# Altium PCB BatteryIot -V2.PcbDoc (part 1 of 2)
Units mm, origin at the board's own origin, x right, y up, seen from the top; angles counter-clockwise.
Board outline 114 x 84 mm, 2 copper layers (Top Layer, Bottom Layer); 153 components, 93 nets, 528 pads, 132 vias.
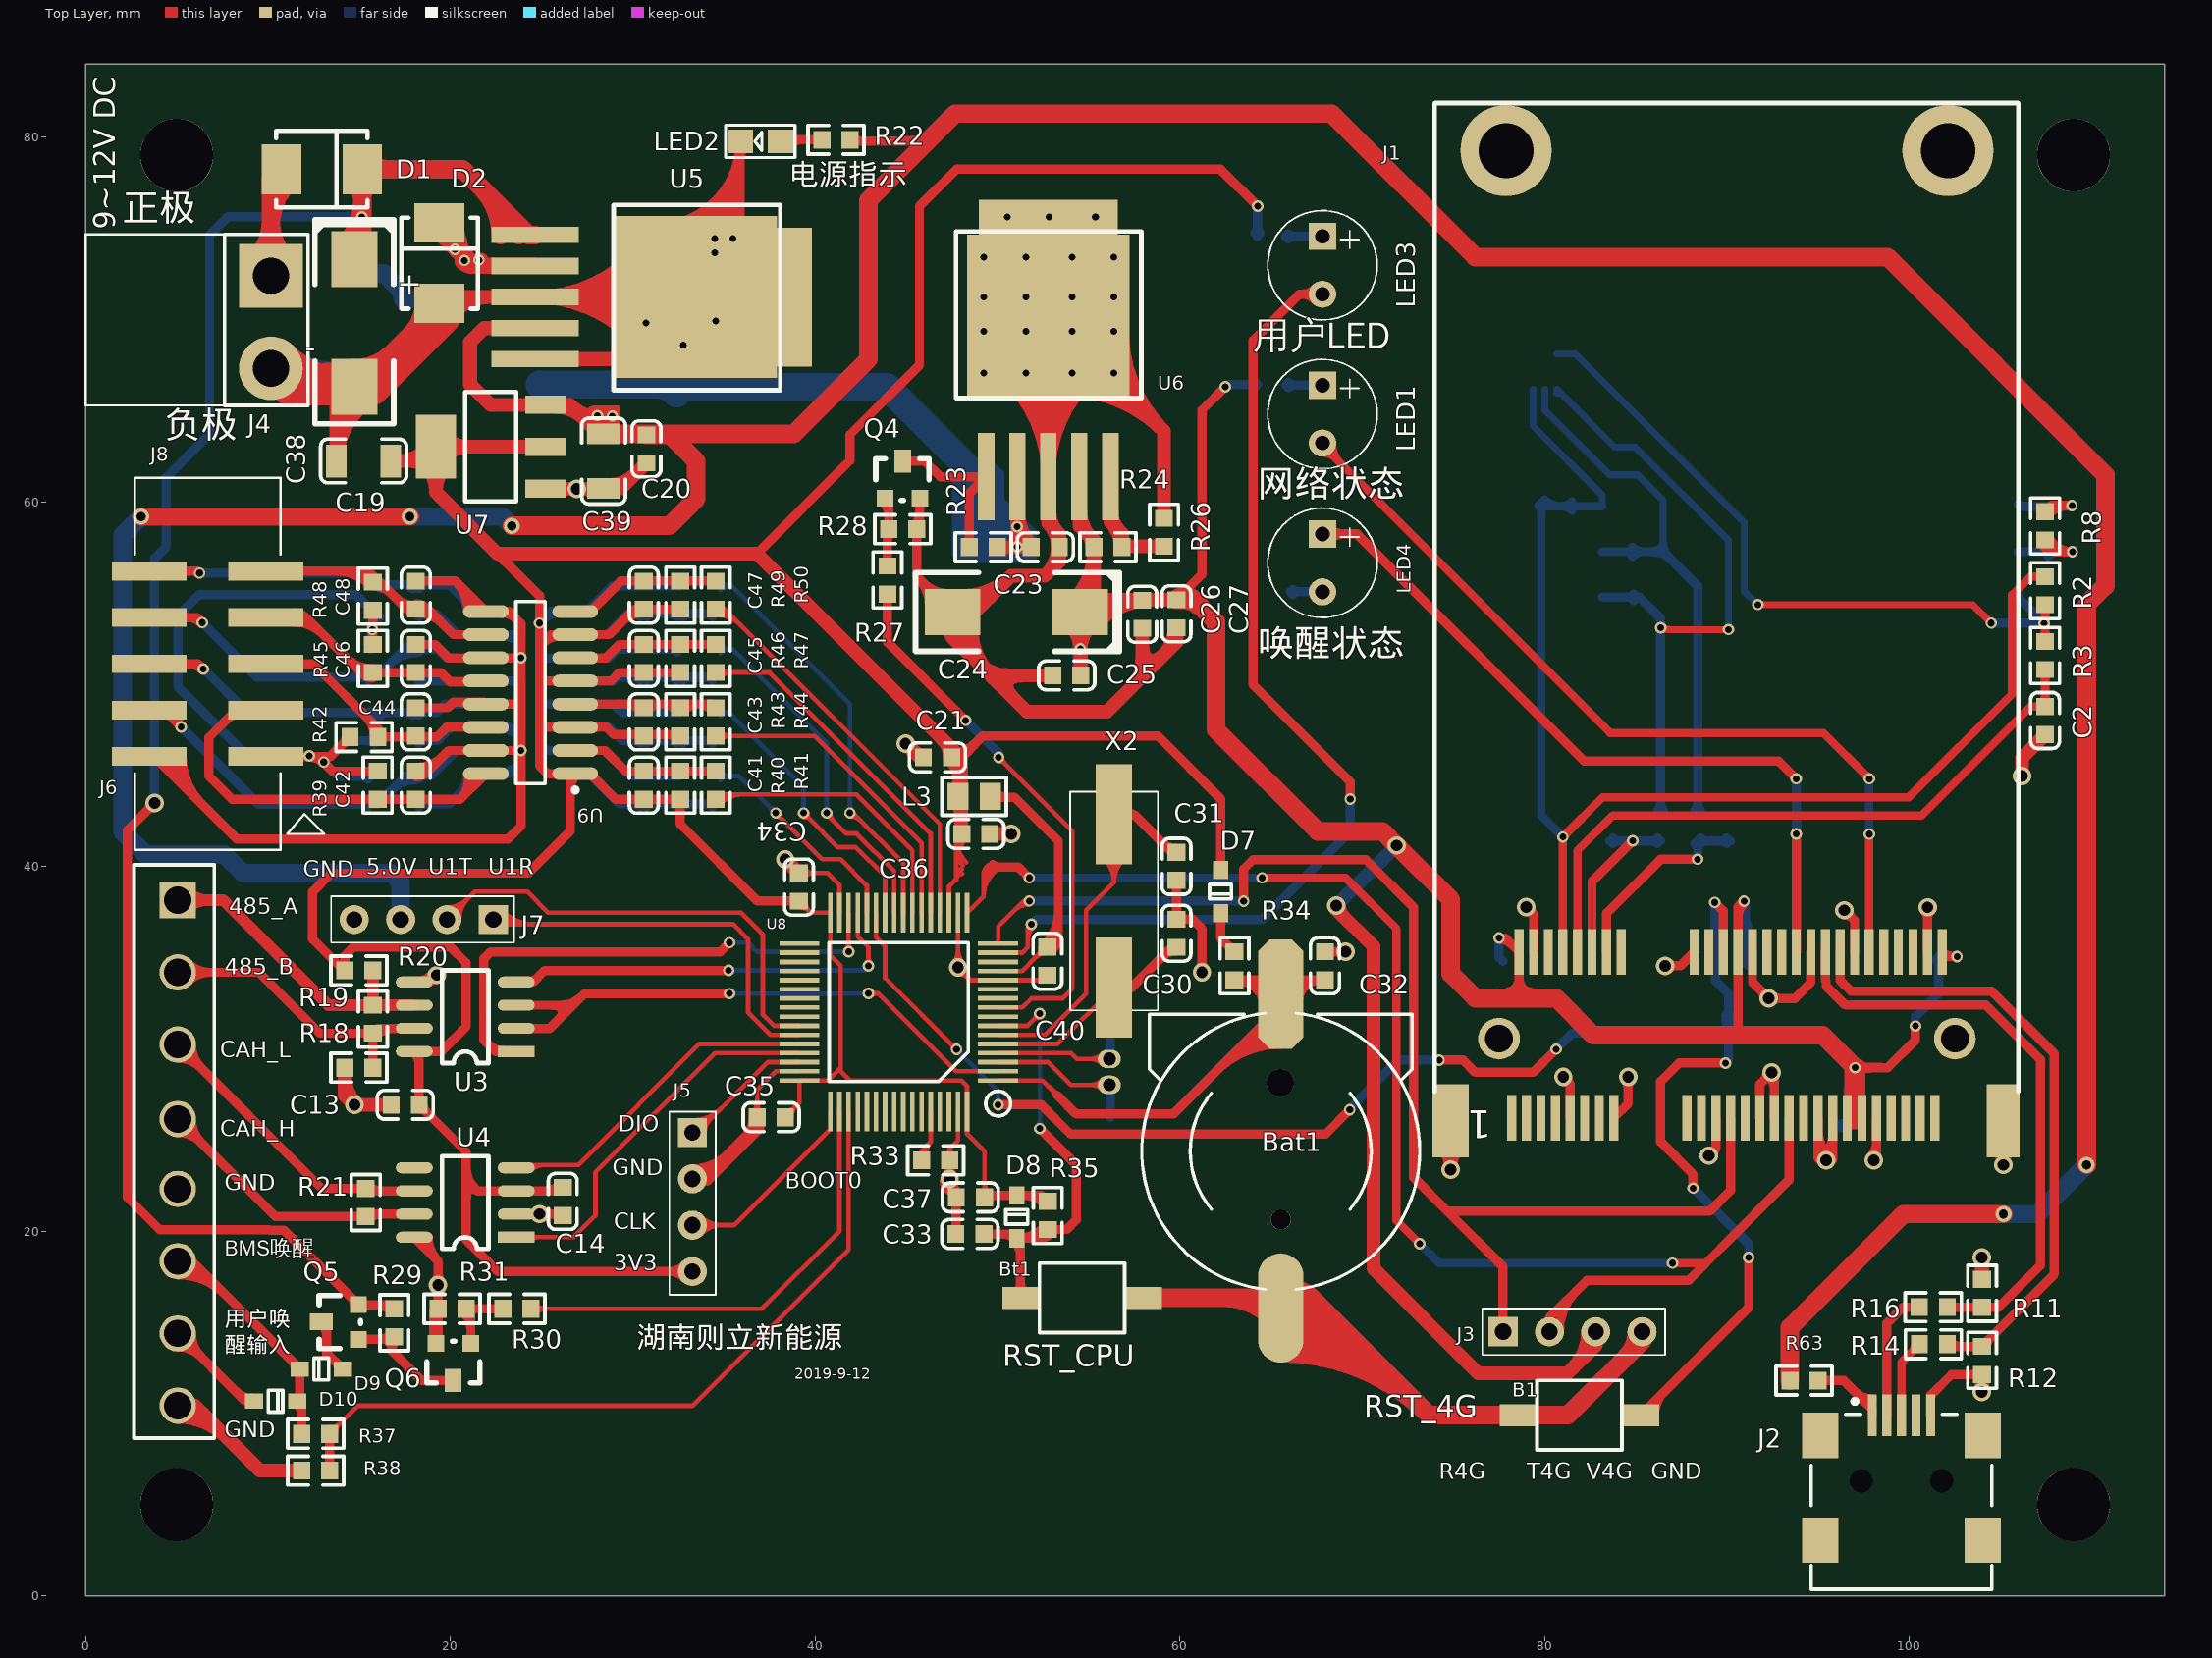
[diagram p0: Top Layer view]
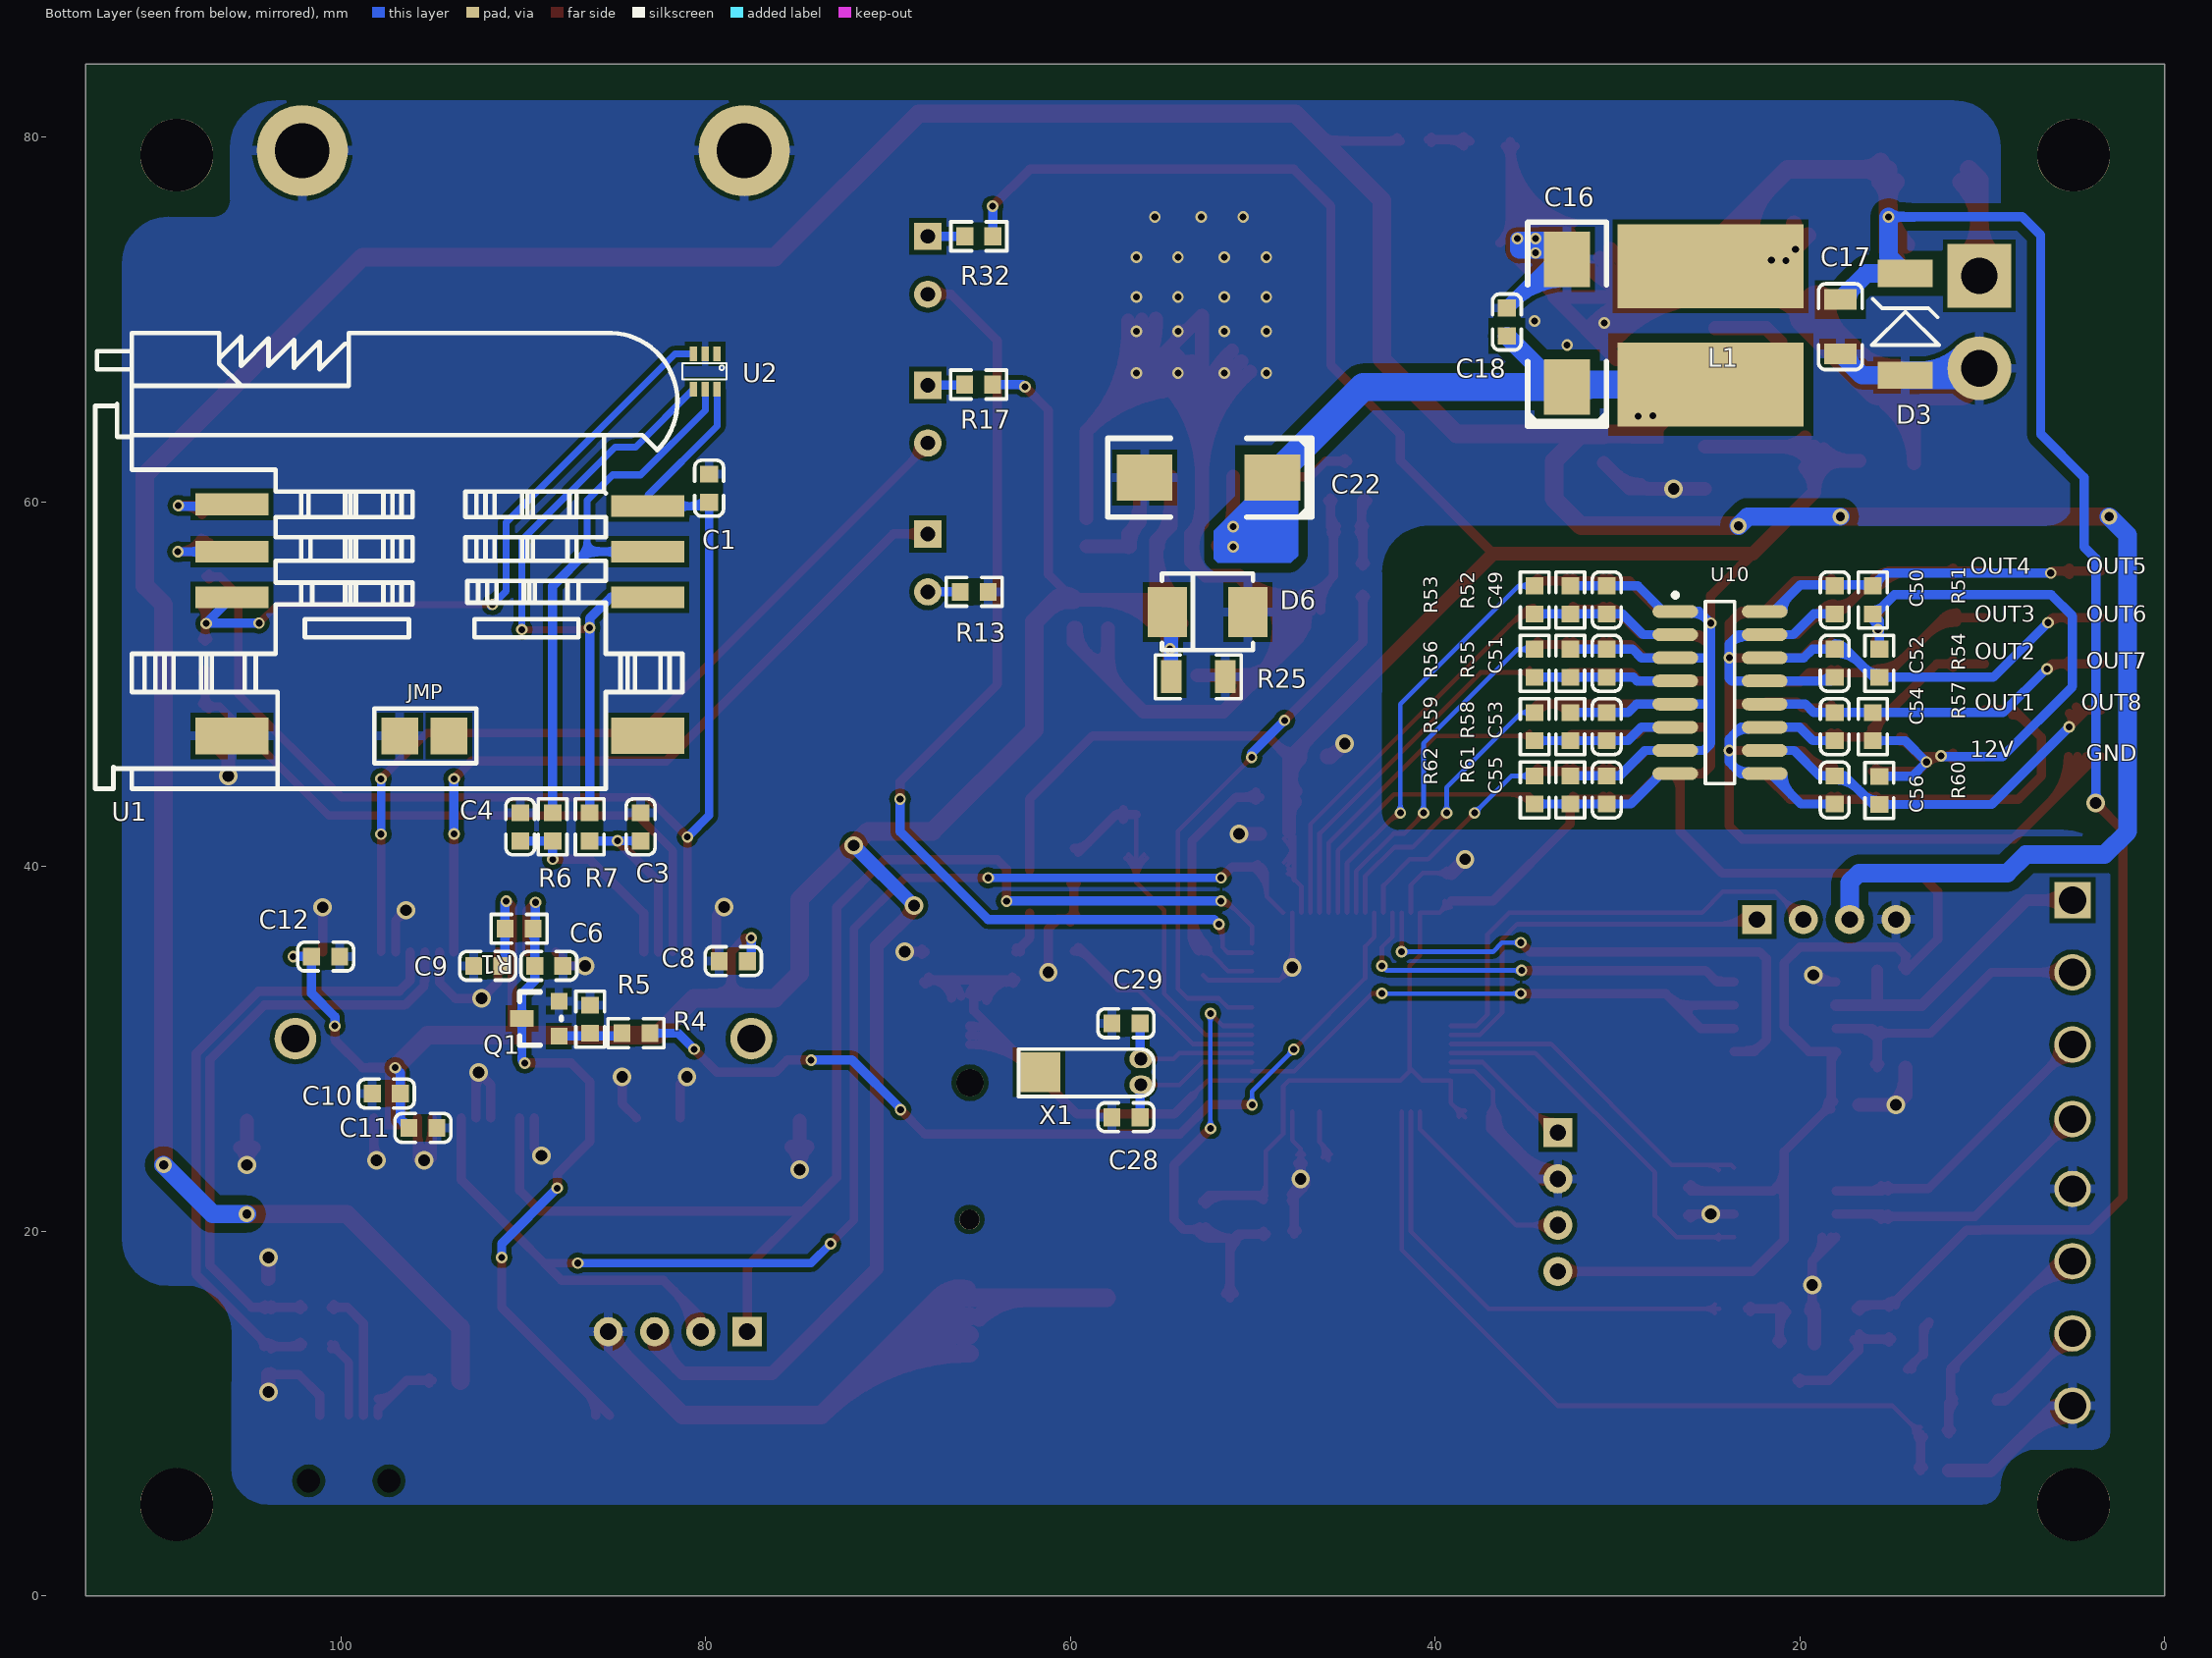
[diagram p1: Bottom Layer view, seen from below]
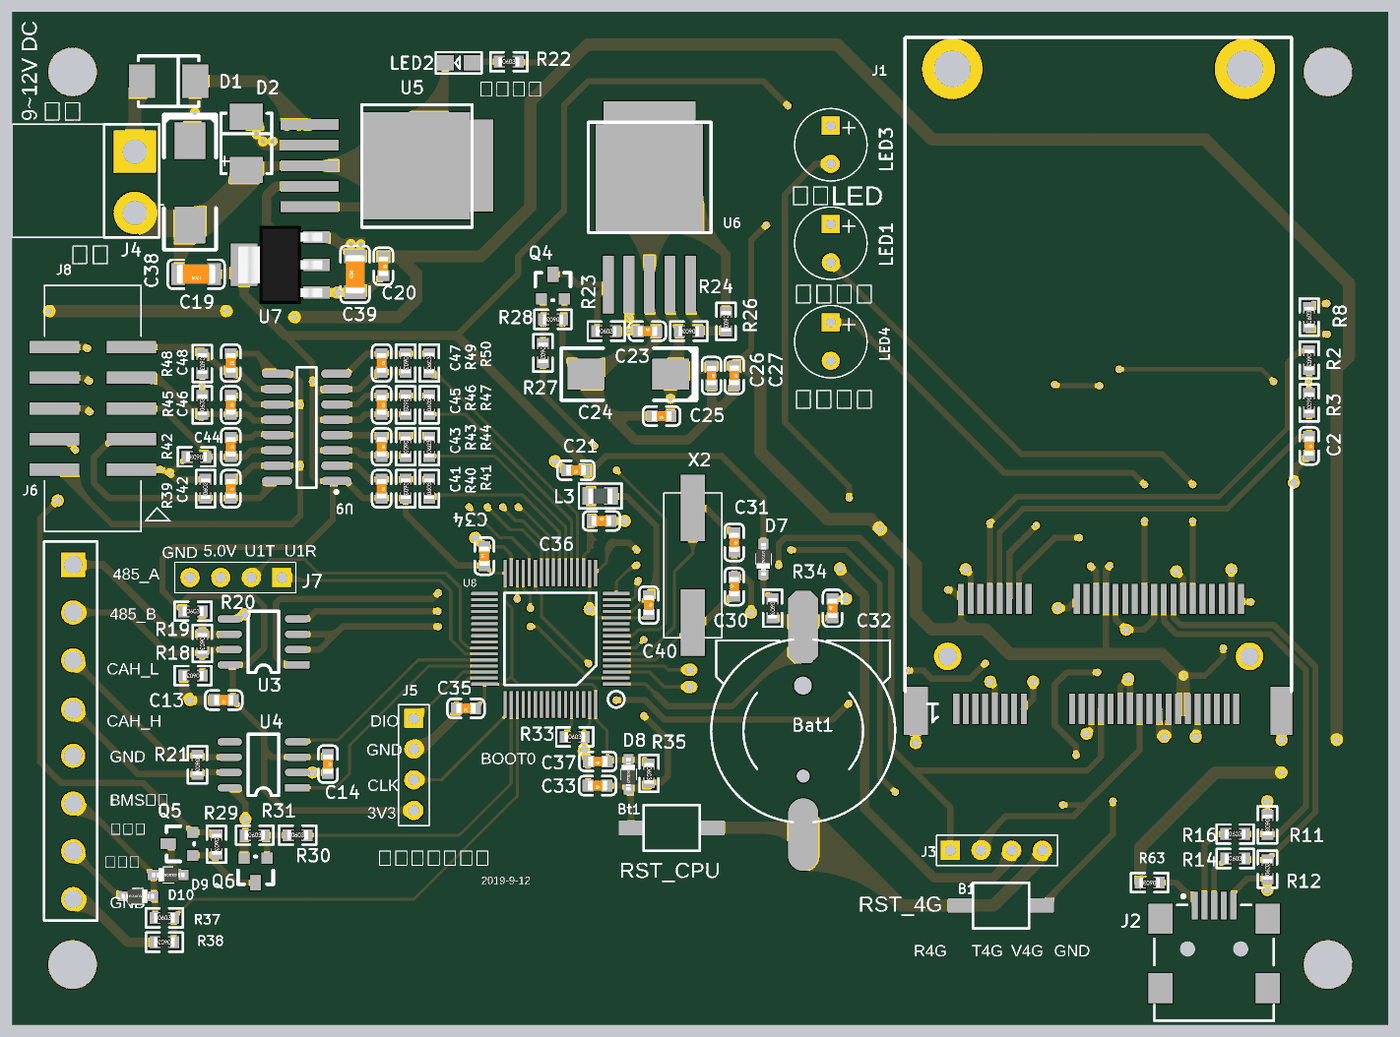
[diagram p3: 3D render of the assembled board from above, using the file's embedded part models]
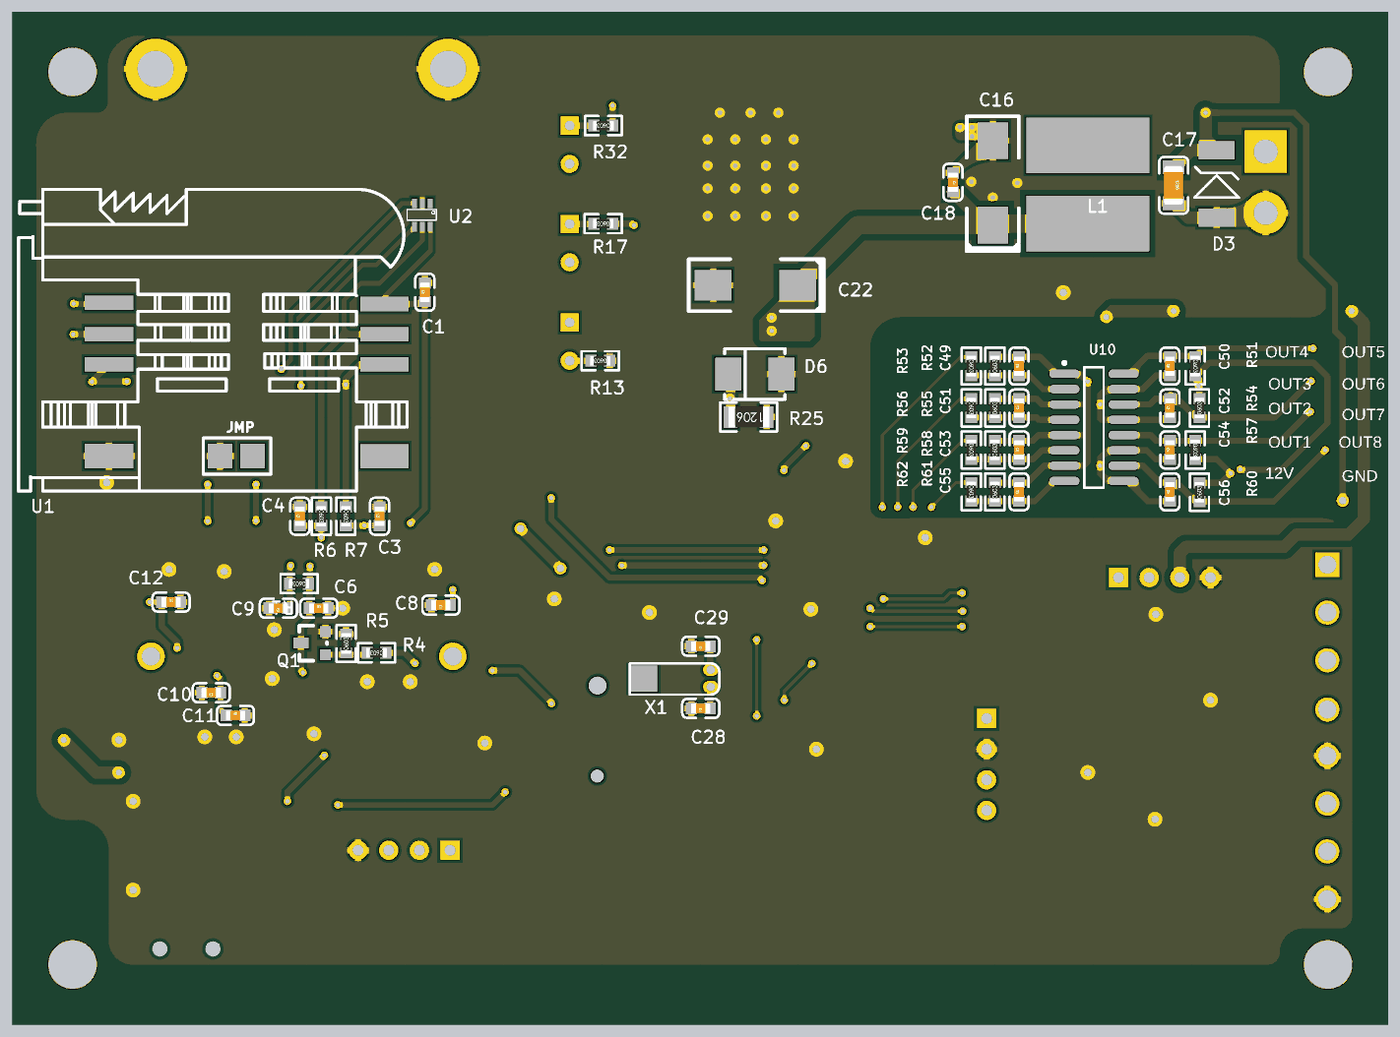
[diagram p4: 3D render of the assembled board from below, using the file's embedded part models]

## Layer stack, top to bottom
Top Solder: solder mask 0.0102, Solder Resist, Dk 3.5
Top Layer: signal copper 0.0356
Dielectric 1: dielectric 0.32, FR-4, Dk 4.8
Bottom Layer: signal copper 0.0356
Bottom Solder: solder mask 0.0102, Solder Resist, Dk 3.5

## Board outline
0,0 0,84 114,84 114,0

## Design rules (kind name [scope] priority, off if disabled: settings)
Clearance Clearance_2 [InNamedPolygon('GND') vs InNetClass('PW_IN')] p1: gap=0.508
Clearance Clearance_1 [InNet('12V') or InNet('5.0V') vs InPoly] p2: gap=0.508
Clearance [All] p3: gap=0.254
DiffPairsRouting [All] p1: maxlimit=0.254 minlimit=0.254 mostfreqgap=0.254 toplayer_minwidth=0.381 toplayer_maxwidth=0.635 toplayer_prefwidth=0.508 bottomlayer_minwidth=0.381 bottomlayer_maxwidth=0.635 bottomlayer_prefwidth=0.508 maxuncoupledlength=12.7
HoleSize [All] p1: absolutevalues=TRUE maxlimit=25.4 minlimit=0.025 maxpercent=80.000 minpercent=20.000
PolygonConnect PolygonConnect_1 [IsVia vs IsPolygon] p1: connectstyle=Direct reliefconductorwidth=0.254 reliefentries=4 polygonreliefangle="90 Angle" airgapwidth=0.254
PolygonConnect [All] p2: connectstyle=Relief reliefconductorwidth=0.508 reliefentries=4 polygonreliefangle="90 Angle" airgapwidth=0.254
RoomDefinition TopLevelMCU [InComponentClass('TopLevelMCU')] p1: confinementstyle=ConfineIn formatcopy=TRUE lockcomponents=FALSE outline -25.411,-46 25.389,-46 25.389,-20.6 -25.411,-20.6
RoomDefinition PWR [InComponentClass('PWR')] p2: confinementstyle=ConfineIn formatcopy=TRUE lockcomponents=FALSE outline -25.411,-46 25.389,-46 25.389,-20.6 -25.411,-20.6
RoomDefinition GPIO [InComponentClass('GPIO')] p3: confinementstyle=ConfineIn formatcopy=TRUE lockcomponents=FALSE outline -25.411,-46 25.389,-46 25.389,-20.6 -25.411,-20.6
RoomDefinition EC20 [InComponentClass('EC20')] p4: confinementstyle=ConfineIn formatcopy=TRUE lockcomponents=FALSE outline -25.411,-46 25.389,-46 25.389,-20.6 -25.411,-20.6
RoomDefinition COMM [InComponentClass('COMM')] p5: confinementstyle=ConfineIn formatcopy=TRUE lockcomponents=FALSE outline -25.411,-46 25.389,-46 25.389,-20.6 -25.411,-20.6
RoutingVias [All] p1: holewidth=0.711 width=1.27 viastyle="Through Hole" minholewidth=0.711 minwidth=1.27 maxholewidth=0.711 maxwidth=1.27
SolderMaskExpansion [All] p1: expansion=0.102
Width [All] p1: maxlimit=20.32 minlimit=0.254 preferedwidth=0.508
27 further rules are at their usual default settings.

## Classes and differential pairs
component class TopLevelMCU: Bat1 Bt1 C28 C29 C30 C31 C32 C33 C34 C35 C36 C37 D7 D8 J5 J6 J7 R33 R34 R35 U8 X1 X2
component class COMM: C13 C14 R18 R19 R20 R21 U3 U4
component class EC20: B1 C1 C2 C3 C4 C6 C8 C9 C10 C11 C12 J1 J2 J3 LED1 LED4 Q1 R1 R2 R3 R4 R5 R6 R7 R8 R11 R12 R13 R14 R16 R17 R63 U1 U2
component class GPIO: C41 C42 C43 C44 C45 C46 C47 C48 C49 C50 C51 C52 C53 C54 C55 C56 D9 D10 J8 LED3 Q5 Q6 R29 R30 R31 R32 R37 R38 R39 R40 R41 R42 R43 R44 R45 R46 R47 R48 R49 R50 R51 R52 R53 R54 R55 R56 R57 R58 R59 R60 R61 R62 U9 U10
component class PWR: C16 C17 C18 C19 C20 C21 C22 C23 C24 C25 C26 C27 C38 C39 C40 D1 D2 D3 D6 J4 L1 L3 LED2 Q4 R22 R23 R24 R25 R26 R27 R28 U5 U6 U7
differential pair USB: +USB_P -USB_N
differential pair CAN: +CAN_P -CAN_N
differential pair RS: +RS_P -RS_N

## Components (designator, comment, footprint, x,y, rotation, side; value= is the part's Value field where it differs from the comment)
B1 "Reset" "3*6*2.5贴片 微动开关" 81.908,9.899 r180 top
Bat1 "3v Battery" BATM 65.532,24.376 r180 top
Bt1 "Reset" "3*6*2.5贴片 微动开关" 54.635,16.332 r180 top
C1 "104" 0603_C 79.812,60.734 r90 bottom
C2 "33pF" 0603_C 107.442,47.998 r270 top
C3 "33pF" 0603_C 83.566,42.164 r90 bottom
C4 "33pF" 0603_C 90.17,42.164 r90 bottom
C6 "104" 0603_C 88.6,34.544 r180 bottom
C8 "104" 0603_C 78.486,34.798 r0 bottom
C9 "104" 0603_C 91.948,34.544 r0 bottom
C10 "104" 0603_C 97.513,27.536 r0 bottom
C11 "104" 0603_C 95.504,25.654 r180 bottom
C12 "104" 0603_C 100.838,35.052 r180 bottom
C13 "104" 0603_C 17.526,26.924 r180 top
C14 "104" 0603_C 26.162,21.623 r270 top
C16 "220uF/16V" SMD-CT-7343 32.766,66.294 r90 bottom
C17 "104" 1206_C 17.78,69.596 r270 bottom
C18 "104" 0603_C 36.068,69.85 r270 bottom
C19 "10uF" 1206_C 15.24,62.23 r180 top
C20 "104" 0603_C 30.748,62.893 r270 top
C21 "104" 0603_C 46.711,45.974 r180 top
C22 "470uF/10V" SMD-CT-7343 48.927,61.317 r0 bottom
C23 "104" 0603_C 52.621,57.506 r0 top
C24 "470uF/10V" SMD-CT-7343 54.54,53.951 r180 top
C25 "104" 0603_C 53.797,50.47 r180 top
C26 "33pF" 0603_C 57.937,53.823 r270 top
C27 "10pF" 0603_C 59.817,53.848 r270 top
C28 "22p" 0603_C 56.956,26.238 r0 bottom
C29 "22p" 0603_C 56.956,31.394 r0 bottom
C30 "22p" 0603_C 59.817,36.33 r90 top
C31 "22p" 0603_C 59.817,39.997 r270 top
C32 "104" 0603_C 67.957,34.544 r90 top
C33 "104" 0603_C 48.489,19.837 r180 top
C34 "104" 0603_C 39.116,38.862 r90 top
C35 "104" 0603_C 37.592,26.238 r180 top
C36 "104" 0603_C 48.819,41.781 r0 top
C37 "104" 0603_C 48.514,21.844 r180 top
C38 "470u/25V" SMD-CT-7343 14.732,73.301 r270 top
C39 "10uF" 1206_C 28.403,62.224 r90 top
C40 "104" 0603_C 52.738,34.798 r270 top
C41 "100nF 10% 50V" 0603_C 30.607,44.45 r270 top
C42 "100nF 10% 50V" 0603_C 18.108,44.45 r270 top
C43 "100nF 10% 50V" 0603_C 30.607,47.924 r270 top
C44 "100nF 10% 50V" 0603_C 18.108,47.924 r270 top
C45 "100nF 10% 50V" 0603_C 30.607,51.398 r270 top
C46 "100nF 10% 50V" 0603_C 18.108,51.398 r270 top
C47 "100nF 10% 50V" 0603_C 30.607,54.872 r270 top
C48 "100nF 10% 50V" 0603_C 18.108,54.872 r270 top
C49 "100nF 10% 50V" 0603_C 30.593,54.61 r90 bottom
C50 "100nF 10% 50V" 0603_C 18.094,54.61 r90 bottom
C51 "100nF 10% 50V" 0603_C 30.593,51.136 r90 bottom
C52 "100nF 10% 50V" 0603_C 18.094,51.136 r90 bottom
C53 "100nF 10% 50V" 0603_C 30.593,47.662 r90 bottom
C54 "100nF 10% 50V" 0603_C 18.094,47.662 r90 bottom
C55 "100nF 10% 50V" 0603_C 30.593,44.188 r90 bottom
C56 "100nF 10% 50V" 0603_C 18.094,44.188 r90 bottom
D1 "SS34" SMB(DO-214AA)_S1 12.954,78.232 r180 top
D2 "SS34" SMB(DO-214AA)_S1 19.406,73.076 r270 top
D3 "M7" SMBJ 14.224,69.596 r90 bottom
D6 "SMBJ5.0A" SMB(DO-214AA)_S1 52.483,53.951 r180 bottom
D7 "1N4148" SOD-323 62.23,38.608 r90 top
D8 "1N4148" SOD-323 51.054,20.777 r270 top
D9 "1N4148" SOD-323 12.925,12.432 r0 top
D10 "1N4148" SOD-323 10.414,10.668 r180 top
J1 "MINI-PCIE-CON" EC20_MINIPCI 90,52.652 r0 top locked
J2 "Debug 4G" USB_MINI_NEW 101.882,6.212 r0 top
J3 "CON4" CON4(2.54) 77.724,14.478 r90 top
J4 "CON2" CON5.08-2P 10.16,72.39 r0 top
J5 "CON4" CON4(2.54) 33.274,25.4 r0 top
J6 "CON8" CON8-3.96mm 5.055,24.286 r0 top
J7 "CON4" CON4(2.54) 22.352,37.084 r270 top
J8 "CON10" XH2.54-SMD-5*2P 6.687,51.105 r90 top locked
L1 "33uH" "CD105-33uH 2A" 24.892,72.898 r180 bottom
L3 "10nH" 0805_L 48.717,43.84 r0 top
LED1 "NET" LED 67.818,64.802 r270 top
LED2 "5VPWR" SMDLED 38.1,79.756 r180 top
LED3 "5VPWR" LED 67.818,72.962 r270 top
LED4 "WAKE" LED 67.818,56.642 r270 top
Q1 "S8050" SOT-23 88.872,31.611 r90 bottom
Q4 "2N5551" SOT-23 44.754,61.017 r0 top
Q5 "AO3401A P道沟 X13A15 SOT-23" SOT-23 14.133,14.972 r90 top
Q6 "2N5551" SOT-23 20.202,13.005 r180 top
R1 "1K" 0603_R 90.23,36.576 r0 bottom
R2 "10K" 0603_R 107.442,55.118 r270 top
R3 "22R" 0603_R 107.442,51.562 r270 top
R4 "4.7K" 0603_R 83.82,30.849 r0 bottom
R5 "47K" 0603_R 86.332,31.619 r90 bottom
R6 "22R" 0603_R 88.392,42.164 r270 bottom
R7 "22R" 0603_R 86.36,42.164 r270 bottom
R8 "0R" 0603_R 107.442,58.674 r90 top
R11 "15K" 0603_R 103.986,16.586 r270 top
R12 "15K" 0603_R 103.986,12.903 r90 top
R13 "1k" 0603_R 65.278,55.054 r0 bottom
R14 "22R" 0603_R 101.319,13.792 r0 top
R16 "22R" 0603_R 101.311,15.824 r0 top
R17 "1k" 0603_R 65.032,66.421 r0 bottom
R18 "360R" 0603_R 14.986,28.956 r180 top
R19 "120R" 0603_R 15.748,31.619 r270 top
R20 "360R" 0603_R 14.986,34.29 r0 top
R21 "120R" 0603_R 15.356,21.563 r270 top
R22 "4.7K" 0603_R 41.148,79.846 r0 top
R23 "51K" 0603_R 49.217,57.506 r0 top
R24 "82K" 0603_R 56.058,57.506 r180 top
R25 "470R" 1206_R 52.991,50.395 r0 bottom
R26 "47K" 0603_R 59.131,58.318 r270 top
R27 "4.7K" 0603_R 43.967,55.702 r270 top
R28 "47K" 0603_R 44.803,58.485 r180 top
R29 "5.1K" 0603_R 16.927,14.972 r270 top
R30 "4.7K" 0603_R 23.65,15.734 r0 top
R31 "47K" 0603_R 20.094,15.734 r0 top
R32 "1k" 0603_R 65.024,74.549 r0 bottom
R33 "10K" 0603_R 46.608,23.876 r0 top
R34 "1K" 0603_R 62.992,34.544 r270 top
R35 "10K" 0603_R 52.756,20.853 r270 top
R37 "8k" 0603_R 12.609,8.876 r0 top
R38 "3.3k" 0603_R 12.609,6.858 r180 top
R39 "3.3KΩ  ±5%" 0603_R 16.016,44.45 r90 top
R40 "2KΩ ±5%" 0603_R 32.604,44.45 r270 top
R41 "700Ω ±10%" 0603_R 34.558,44.45 r90 top
R42 "3.3KΩ  ±5%" 0603_R 15.265,47.092 r180 top
R43 "2KΩ ±5%" 0603_R 32.604,47.924 r270 top
R44 "700Ω ±10%" 0603_R 34.558,47.924 r90 top
R45 "3.3KΩ  ±5%" 0603_R 15.748,51.398 r90 top
R46 "2KΩ ±5%" 0603_R 32.604,51.398 r270 top
R47 "700Ω ±10%" 0603_R 34.558,51.398 r90 top
R48 "3.3KΩ  ±5%" 0603_R 15.748,54.813 r270 top
R49 "2KΩ ±5%" 0603_R 32.604,54.872 r270 top
R50 "700Ω ±10%" 0603_R 34.558,54.872 r90 top
R51 "3.3KΩ  ±5%" 0603_R 16.002,54.61 r270 bottom
R52 "2KΩ ±5%" 0603_R 32.59,54.61 r90 bottom
R53 "700Ω ±10%" 0603_R 34.544,54.61 r270 bottom
R54 "3.3KΩ  ±5%" 0603_R 15.646,51.136 r90 bottom
R55 "2KΩ ±5%" 0603_R 32.59,51.136 r90 bottom
R56 "700Ω ±10%" 0603_R 34.544,51.136 r270 bottom
R57 "3.3KΩ  ±5%" 0603_R 16.002,47.662 r270 bottom
R58 "2KΩ ±5%" 0603_R 32.59,47.662 r90 bottom
R59 "700Ω ±10%" 0603_R 34.544,47.662 r270 bottom
R60 "3.3KΩ  ±5%" 0603_R 15.646,44.163 r90 bottom
R61 "2KΩ ±5%" 0603_R 32.59,44.188 r90 bottom
R62 "700Ω ±10%" 0603_R 34.544,44.188 r270 bottom
R63 "0R" 0603_R 94.226,11.797 r180 top
U1 "SIM" SIM_BIG_POPUP 94.574,53.504 r90 bottom locked
U2 "SMF05C" SOT363 79.372,68.106 r0 bottom
U3 "SP3485" SOP8 20.817,31.75 r180 top
U4 "SN65HVD230DR" SO-8 23.611,19.658 r180 top
U5 "LM2596" TO-263-5-NEW 29.588,72.223 r180 top
U6 "MIC29302" TO-263-5-NEW 51.787,66.318 r270 top
U7 "AMS1117-3.3" SOT-223 22.209,63.009 r0 top
U8 "STM32F103RET6" LQFP64 50.038,28.258 r180 top locked
U9 "TLP291-4" SOP16_M 24.398,49.53 r180 top
U10 "TLP291-4" SOP16_M 24.384,49.53 r180 bottom
X1 "32.768kHz" XTAL32 56.134,28.016 r0 bottom
X2 "8MHz" Crystal_SMD 56.388,38.1 r90 top

## Footprints (in the part's own frame and the unit in brackets; to place one, negate y for a bottom-side part, rotate by r counter-clockwise, add the part's x,y. Pads: shape width x height; smd on the part's side, far side on the other; paste and mask are expansions set on the pad)
"3*6*2.5贴片 微动开关" [mm]
  rect 2x1.2 smd mask+0.05: 1(-3.375,0) 2(3.375,0)
  silkscreen extent -2.33,-1.9 2.32,1.9
0603_C [mm]
  rect 0.93x0.98 smd: 1(-0.77,0) 2(0.77,0)
  silkscreen extent -1.53,-0.79 1.54,0.79, body extent -0.8,-0.4 0.8,0.4, height 0.3
0603_R [mm]
  rect 0.93x0.98 smd: 1(-0.77,0) 2(0.77,0)
  silkscreen extent -1.53,-0.79 1.54,0.79, body extent -0.85,-0.4 0.85,0.4, height 0.56
0805_L [mm]
  rect 1.16x1.47 smd: 1(-0.89,0) 2(0.89,0)
  silkscreen extent -1.77,-1.04 1.77,1.03, body extent -1,-0.64 1,0.64, height 0.6
1206_C [mm]
  rect 1.13x1.8 smd: 1(-1.49,0) 2(1.49,0)
  silkscreen extent -2.36,-1.2 2.35,1.2, body extent -1.6,-0.81 1.6,0.79, height 1
1206_R [mm]
  rect 1.13x1.8 smd: 1(-1.49,0) 2(1.49,0)
  silkscreen extent -2.36,-1.2 2.35,1.2, body extent -1.7,-0.86 1.65,0.87, height 0.85
BATM [mm]
  round 1.1 hole 1.1 unplated: 0(0,3.748)
  round 1.5 hole 1.5 unplated: 0(0.025,-3.752)
  oct 2.5x6 smd: 1(0,-8.602)
  oval 2.5x6 smd: 2(0,8.598)
  silkscreen extent -7.62,-7.58 7.62,7.57
"CD105-33uH 2A" [mm]
  rect 10.2x4.6 smd: 1(0,0) 2(0,-6.477)
CON4(2.54) [mm]
  rect 1.6x1.6 hole 0.9 mask+0.05: 1(0,0)
  round 1.6 hole 0.9 mask+0.05: 2(0,-2.54)
  round 1.6 hole 0.9: 3(0,-5.08) 4(0,-7.62)
  silkscreen extent -1.27,-8.89 1.27,1.14
CON5.08-2P [mm]
  rect 3.5x3.5 hole 2: 1(0,0)
  round 3.5 hole 2: 2(0,-5.08)
  silkscreen extent -10.16,-7.11 2.03,2.26
CON8-3.96mm [mm]
  rect 2x2 hole 1.5: 1(0,13.86)
  round 2 hole 1.5: 2(0,9.9) 3(0,5.94) 4(0,1.86) 5(0,-1.98) 6(0,-5.94) 7(0,-9.9) 8(0,-13.86)
  silkscreen extent -2.4,-15.64 2,15.79
Crystal_SMD [mm]
  rect 5.5x2 smd: 1(-4.75,0) 2(4.75,0)
  silkscreen extent -6,-2.4 6,2.4
EC20_MINIPCI [mm]
  round 2.286 hole 1.524: 0(-12.5,-22.1) 0(12.5,-22.1)
  rect 0.5x2.5 smd: 1(-11.8,-26.45) 2(-11.4,-17.35) 3(-11,-26.45) 4(-10.6,-17.35) 5(-10.2,-26.45) 6(-9.8,-17.35) 7(-9.4,-26.45) 8(-9,-17.35) 9(-8.6,-26.45) 10(-8.2,-17.35) 11(-7.8,-26.45) 12(-7.4,-17.35) 13(-7,-26.45) 14(-6.6,-17.35) 15(-6.2,-26.45) 16(-5.8,-17.35) 17(-2.2,-26.45) 18(-1.8,-17.35) 19(-1.4,-26.45) 20(-1,-17.35) 21(-0.6,-26.45) 22(-0.2,-17.35) 23(0.2,-26.45) 24(0.6,-17.35) 25(1,-26.45) 26(1.4,-17.35) 27(1.8,-26.45) 28(2.2,-17.35) 29(2.6,-26.45) 30(3,-17.35) 31(3.4,-26.45) 32(3.8,-17.35) 33(4.2,-26.45) 34(4.6,-17.35) 35(5,-26.45) 36(5.4,-17.35) 37(5.8,-26.45) 38(6.2,-17.35) 39(6.6,-26.45) 40(7,-17.35) 41(7.4,-26.45) 42(7.8,-17.35) 43(8.2,-26.45) 44(8.6,-17.35) 45(9,-26.45) 46(9.4,-17.35) 47(9.8,-26.45) 48(10.2,-17.35) 49(10.6,-26.45) 50(11,-17.35) 51(11.4,-26.45) 52(11.8,-17.35)
  round 5 hole 3: 53(12.12,26.6) 54(-12.116,26.6)
  rect 1.8x4 smd: 55(15.15,-26.6)
  rect 2x4 smd: 56(-15.15,-26.6)
  silkscreen extent -16.04,-25.01 15.97,29.21
LED [mm]
  rect 1.5x1.5 hole 0.8: 1(-1.587,0)
  round 1.5 hole 0.8: 2(1.587,0)
  silkscreen extent -3,-3 3,3
LQFP64 [mm]
  rect 2.2x0.254 smd: 1(0,0) 2(0,-0.5) 3(0,-1) 4(0,-1.5) 5(0,-2) 6(0,-2.5) 7(0,-3) 8(0,-3.5) 9(0,-4) 10(0,-4.5) 11(0,-5) 12(0,-5.5) 13(0,-6) 14(0,-6.5) 15(0,-7) 16(0,-7.5) 33(10.9,-7.5) 34(10.9,-7) 35(10.9,-6.5) 36(10.9,-6) 37(10.9,-5.5) 38(10.9,-5) 39(10.9,-4.5) 40(10.9,-4) 41(10.9,-3.5) 42(10.9,-3) 43(10.9,-2.5) 44(10.9,-2) 45(10.9,-1.5) 46(10.9,-1) 47(10.9,-0.5) 48(10.9,0)
  rect 0.254x2.2 smd: 17(1.7,-9.2) 18(2.2,-9.2) 19(2.7,-9.2) 20(3.2,-9.2) 21(3.7,-9.2) 22(4.2,-9.2) 23(4.7,-9.2) 24(5.2,-9.2) 25(5.7,-9.2) 26(6.2,-9.2) 27(6.7,-9.2) 28(7.2,-9.2) 29(7.7,-9.2) 30(8.2,-9.2) 31(8.7,-9.2) 32(9.2,-9.2) 49(9.2,1.7) 50(8.7,1.7) 51(8.2,1.7) 52(7.7,1.7) 53(7.2,1.7) 54(6.7,1.7) 55(6.2,1.7) 56(5.7,1.7) 57(5.2,1.7) 58(4.7,1.7) 59(4.2,1.7) 60(3.7,1.7) 61(3.2,1.7) 62(2.7,1.7) 63(2.2,1.7) 64(1.7,1.7)
  silkscreen extent -0.68,-7.56 9.26,1.95
SIM_BIG_POPUP [mm]
  rect 1.2x4 smd: 1(6.25,-11.4) 2(3.75,-11.4) 3(1.25,-11.4) 4(6.35,11.4) 5(3.75,11.4) 6(1.25,11.4)
  rect 2.032x2.032 smd: 7(-6.35,-0.5) 8(-6.35,2.2)
  rect 2x4 smd: 7(-6.35,-11.4)
  rect 2.032x4 smd: 8(-6.35,11.4)
  silkscreen extent -9.25,-13.3 15.75,18.9
SMB(DO-214AA)_S1 [mm]
  rect 2.159x2.743 smd: 1(2.21,0) 2(-2.21,0)
  silkscreen extent -2.5,-2.1 2.5,2.1
SMBJ [mm]
  rect 1.5x3 smd: 1(-2.667,0) 2(2.921,0)
  silkscreen extent -1.02,-1.85 1.52,1.83
SMD-CT-7343 [mil]
  rect 120x100 smd: 1(0,0) 2(275.59,0)
  silkscreen extent -85,-85 356,85
SMDLED [mm]
  rect 1.4x1.27 smd: 1(0.001,-0.002) 2(2.211,-0.002)
  silkscreen extent -0.8,-0.89 3.01,0.89
SO-8 [mil]
  rect 80x24 smd: 1(0,0)
  oval 80x24 smd: 2(0,-50) 3(0,-100) 4(0,-150) 5(220,-150) 6(220,-100) 7(220,-50) 8(220,0)
  silkscreen extent 60,-175 160,25
SOD-323 [mm]
  rect 1x0.83 smd: 1(1.18,0) 2(-1.18,0)
  silkscreen extent -0.4,-0.6 0.4,0.6, body extent -1.35,-0.62 1.35,0.63, height 1.1
SOP8 [mil]
  rect 80x24 smd: 1(-110,75)
  oval 80x24 smd: 2(-110,25) 3(-110,-25) 4(-110,-75) 5(110,-75) 6(110,-25) 7(110,25) 8(110,75)
  silkscreen extent -50,-100 50,100
SOP16_M [mm]
  oval 2.5x0.7 smd: 1(-2.45,4.445) 2(-2.45,3.175) 3(-2.45,1.905) 4(-2.45,0.635) 5(-2.45,-0.635) 6(-2.45,-1.905) 7(-2.45,-3.175) 8(-2.45,-4.445) 9(2.45,-4.445) 10(2.45,-3.175) 11(2.45,-1.905) 12(2.45,-0.635) 13(2.45,0.635) 14(2.45,1.905) 15(2.45,3.175) 16(2.45,4.445)
  silkscreen extent -2.57,-5 0.8,5.47, body extent -2,-5 2,5, height 1.75
SOT363 [mm]
  rect 0.4x0.8 smd: 1(0,0) 2(0.65,0) 3(1.3,0) 4(1.3,1.94) 5(0.65,1.94) 6(0,1.94)
  silkscreen extent -0.51,0.51 1.91,1.4
SOT-23 [mil]
  rect 36x36 smd: 1(-36.06,-32.44) 2(38.94,-32.44)
  rect 36x50 smd: 3(1.94,47.56)
  silkscreen extent -56,-37 59,53
SOT-223 [mm]
  rect 2.2x1 smd: 1(3,-2.3) 2(3,0) 3(3,2.3)
  rect 2.2x3.5 smd: 2(-3,0)
  silkscreen extent -1.4,-3 1.4,3, body extent -3.49,-3.24 3.49,3.24, height 1.64
TO-263-5-NEW [mm]
  rect 4.8x0.9 smd: 1(4.95,-2.402) 2(4.95,-0.701) 3(4.95,1.001) 4(4.95,2.703) 5(4.95,4.405)
  rect 2.5x7.62 smd: 3(-9,1)
  rect 8.89x8.89 smd: 3(-3.889,1)
  silkscreen extent -8.51,-4.05 0.64,6.11
USB_MINI_NEW [mm]
  rect 0.5x2.3 smd: 1(-3.914,3.687) 2(-3.114,3.687) 3(-2.314,3.687) 4(-1.514,3.687) 5(-0.714,3.687)
  rect 2x2.5 smd: 6(2.136,2.587) 7(2.136,-3.167) 8(-6.764,2.587) 9(-6.764,-3.167)
  round 0.6 hole 1.27 unplated: MH1(-0.114,0.087) MH2(-4.514,0.087)
  silkscreen extent -7.26,-5.86 2.64,4.57
XH2.54-SMD-5*2P [mm]
  rect 1.02x4.1 smd: 1(-5.08,-3.194) 2(-2.54,-3.194) 3(0,-3.194) 4(2.54,-3.194) 5(5.08,-3.194) 6(5.08,3.194) 7(2.54,3.194) 8(0,3.194) 9(-2.54,3.194) 10(-5.08,3.194)
  silkscreen extent -10.2,-4 10.2,4
XTAL32 [mil]
  oval 50x40 hole 28: 1(0,0) 2(0,-56)
  rect 92.13x86 smd: ""(220,-27)
  silkscreen extent -28,-77 264,25

## Part data
B1 Bt1: library part "PUSH BUTTON"
Bat1: library part MS621FE
C1 C2 C3 C4 C6 C8 C9 C10 C11 C12 C13 C14 C17 C18 C19 C20 C21 C23 C25 C26 C27 C32 C33 C34 C35 C36 C37 C39 C40: library part C
C16 C22 C24 C38: library part CAP
C28 C29 C30 C31: library part CAP, "Capacitor"
C41 C42 C43 C44 C45 C46 C47 C48 C49 C50 C51 C52 C53 C54 C55 C56: library part "0603 1nF (102) 10% 50V", "贴片电容"
D3 D6: library part SMBJ, "TVS"
D7 D8: library part D
D9 D10: library part SS34
J2: library part USB5
L1 L3: library part L
LED1 LED2 LED3 LED4: library part LED2, "Typical RED, GREEN, YELLOW, AMBER GaAs LED"
Q1 Q4 Q6: library part NPN
Q5: "MOS(场效应管)"
R1 R4 R5 R33 R34 R35: library part R
R2 R3 R6 R7 R8 R11 R12 R13 R14 R16 R17 R18 R19 R20 R21 R22 R23 R24 R25 R26 R27 R28 R29 R30 R31 R32 R37 R38 R63: library part RES
R39 R42 R45 R48 R51 R54 R57 R60: library part "0603 3.3KΩ (3301) 1%", "贴片电阻"
R40 R43 R46 R49 R52 R55 R58 R61: library part "0603 2KΩ (2001) 1%", "贴片电阻"
R41 R44 R47 R50 R53 R56 R59 R62: library part "0603 5.6KΩ (5601) 1%", "贴片电阻"
U1: library part SIM-抽屉式插卡
U3: library part SP3485E
U4: library part TJA1050
U6: library part MIC29302WU
U7: library part AMS1117
U8: library part STM32F103RDT6
U9 U10: library part PS2801, "东芝四通道光耦 SOP16"
X1 X2: library part Crystal2

## Free pads (board coordinates)
  round 4 hole 4: 0(5,5) 0(5,79) 0(109,5) 0(109,79)

## Via types
v1: diameter 0.635, hole 0.381, Top Layer to Bottom Layer, 96 vias
v2: diameter 1.016, hole 0.635, Top Layer to Bottom Layer, 31 vias
v3: diameter 0.889, hole 0.508, Top Layer to Bottom Layer, 5 vias

## Nets (pads, with @x,y where several pads share a name; then routed paths per layer and width w, separated by ;. In a path a pad name is that pad's centre, name@x,y a point inside that pad or via, vN(x,y) a via of type N, cw(c..) or ccw(c..) an arc to the next point about the centre after c; other vN are vias at no path point)
3.3V: C13.1 C14.1 C19.1 C21.1 C34.1 C35.1 C36.1 C37.1 C41.2 C43.2 C45.2 C47.2 C49.2 C51.2 C53.2 C55.2 D7.1 D8.2 J5.4 L3.1 R20.1 R32.1 R35.1 R40.2 R43.2 R46.2 R49.2 R52.2 R55.2 R58.2 R61.2 U3.8 U4.3 U7.2 U8.19 U8.32 U8.48 U8.64 U9.1 U9.3 U9.5 U9.7 U10.1 U10.3 U10.5 U10.7 | length 359.6
  Top Layer w0.254: C35.1@38.362,26.238 39.138,27.014 39.138,28.25 40.696,28.25 41.402,28.956 ; C35.1@38.362,26.601 ccw(c38.362,27.478) 38.982,26.858 ; C35.1@38.7,26.263 cw(c39.456,26.263) 38.921,26.798 ; C34.1@39.116,38.092 39.75,37.458 U8.32@40.838,37.458 40.838,35.108 41.402,34.544 41.402,28.956 ; C34.1@39.141,37.754 cw(c39.141,36.998) 39.675,37.533 ; C34.1@39.479,38.092 ccw(c40.355,38.092) 39.736,37.472 ; U8.19@47.338,37.458 47.338,38.914 47.744,39.32 C36.1@47.744,41.656 ; 47.744,39.248 cw(c48.089,39.248) 48.069,39.592 ; 47.744,39.517 cw(c48.073,39.517) 48.054,39.845 ; 47.744,40.204 cw(c49.601,40.204) C36.1@48.288,41.517 ; 47.744,40.817 cw(c48.987,40.817) C36.1@48.108,41.696 ; 47.744,40.918 ccw(c48.987,40.918) 48.108,40.039 ; C36.1@47.744,41.531 ccw(c49.601,41.531) 48.288,40.218 ; C37.1@49.284,21.844 49.284,24.376 48.338,25.322 U8.64@48.338,26.558 48.338,27.938 48.026,28.25 41.91,28.25 41.402,28.758 41.402,28.956 ; 49.284,22.685 ccw(c50.1,22.685) C37.1@49.523,22.108
  Top Layer w0.508: 13.718,34.732 ccw(c14.216,35.23) R20.1@14.216,34.526 ; R20.1@14.067,34.464 ccw(c13.707,34.824) 14.216,34.824 ccw(c14.725,34.824) R20.1@14.365,34.464 ; U3.8@17.987,29.809 cw(c17.28,29.102) 18.28,29.102 ; C13.1@18.147,27.098 ccw(c17.825,27.42) 18.28,27.42 ; 18.28,27.497 ccw(c18.844,27.497) C13.1@18.445,27.098 ; C13.1@18.296,26.688 cw(c18.296,26.138) C13.1@18.685,26.527 ; C13.1@18.507,26.899 ccw(c18.975,26.899) C13.1@18.644,26.568 ; 22.581,57.15 24.892,54.839 v1(24.892,53.34) 24.892,52.07 ; 25.066,52.244 cw(c25.948,51.361) U9.7@25.948,52.609 ; 25.156,22.198 ccw(c25.156,23.375) C14.1@25.988,22.543 ; C14.1@26.162,22.393 25.967,22.198 U4.3@23.611,22.198 21.49,22.198 20.864,22.824 ; 26.563,44.165 cw(c27.768,44.165) U9.1@26.916,45.017 ; U9.1@27.844,45.085 ccw(c28.286,45.085) 27.973,44.772 ; 29.397,53.4 cw(c30.582,52.215) C47.2@30.582,53.891 ; C47.2@30.428,53.959 ccw(c30.099,53.654) 30.099,54.102 ; C47.2@30.428,54.245 cw(c30.099,54.55) 30.099,54.102 ; C41.2@30.433,43.531 ccw(c30.073,43.171) 30.073,43.68 ccw(c30.073,44.189) C41.2@30.433,43.829 ; C41.2@30.781,43.531 cw(c31.142,43.171) 31.142,43.68 cw(c31.142,44.189) C41.2@30.781,43.829 ; C47.2@30.781,53.953 cw(c31.142,53.593) 31.142,54.102 cw(c31.142,54.611) C47.2@30.781,54.251 ; 31.891,47.228 cw(c31.891,46.466) R43.2@32.43,47.005 ; R40.2@32.43,43.531 ccw(c32.069,43.171) 32.069,43.68 ccw(c32.069,44.189) R40.2@32.43,43.829 ; R49.2@32.43,53.953 ccw(c32.069,53.593) 32.069,54.102 ccw(c32.069,54.611) R49.2@32.43,54.251 ; R40.2@32.455,43.531 cw(c32.094,43.171) 32.604,43.171 cw(c33.113,43.171) R40.2@32.753,43.531 ; R43.2@32.604,47.154 32.53,47.228 28.956,47.228 28.559,47.625 U9.3@26.848,47.625 25.019,47.625 24.892,47.498 ; R46.2@32.604,50.628 29.27,50.628 28.807,50.165 U9.5@26.848,50.165 24.943,50.165 24.892,50.114 ; R49.2@32.604,54.102 30.099,54.102 ; J5.4@32.888,17.394 ccw(c31.956,16.462) 31.956,17.78 ccw(c31.956,19.098) J5.4@32.888,18.166 ; J5.4@33.274,17.78 22.606,17.78 20.864,19.522 20.864,22.824 ; 36.805,57.15 41.91,62.255 41.91,63.678 45.72,67.488 45.72,76.2 47.752,78.232 62.23,78.232 v1(64.262,76.2) ; C34.1@39.116,38.092 36.838,38.092 32.604,42.326 R40.2@32.604,43.68 C41.2@30.607,43.68 29.066,43.68 27.661,45.085 U9.1@26.848,45.085 ; C21.1@47.481,46.21 ccw(c47.481,48.048) 48.78,46.748 ; 48.006,45.974 49.186,47.154 58.789,47.154 62.23,43.713 D7.1@62.23,39.788 ; C37.1@49.397,21.957 D8.2@51.054,21.957 52.422,21.957 R35.1@52.756,21.623 ; C37.1@49.433,21.72 cw(c50.006,21.147) 50.006,21.957 ; D8.2@51.416,21.957 cw(c51.416,20.308) R35.1@52.582,21.474 ; 20.864,22.824 20.864,24.348 18.28,26.932 18.28,29.588 U3.8@18.023,29.845 19.507,29.845 20.864,31.202 20.864,34.714 20.01,35.568 14.677,35.568 14.161,35.052 14.216,34.996 R20.1@14.216,34.29 14.161,34.29 12.446,36.005 12.446,38.608 13.462,39.624 24.269,39.624 26.563,41.918 26.563,44.8 U9.1@26.848,45.085 ; 24.892,47.498 24.892,50.114 ; 24.892,47.498 24.892,45.504 25.311,45.085 U9.1@26.848,45.085 ; 24.892,50.114 24.892,52.07 ; 24.892,52.07 25.527,52.705 U9.7@26.848,52.705 28.702,52.705 30.099,54.102
  Top Layer w0.762: C19.1@16.73,62.23 18.43,62.23 U7.2@19.209,63.009 ; C19.1@17.162,62.23 ccw(c17.162,64.406) U7.2@18.701,62.867 ; 17.785,62.23 cw(c17.785,60.935) 18.701,61.851 cw(c17.473,60.623) 19.209,60.623 cw(c20.945,60.623) U7.2@19.718,61.851 ; U7.2@19.718,62.501 cw(c20.945,61.273) 20.945,63.009 cw(c20.945,64.745) U7.2@19.718,63.517 ; U7.2@25.209,63.009 U7.2@19.209,63.009 ; 47.001,46.953 cw(c46.047,45.999) C21.1@47.397,45.999 ; C21.1@47.421,45.89 cw(c46.009,44.478) L3.1@48.006,44.478 ; L3.1@47.677,44.125 ccw(c46.969,44.736) 47.872,44.978 ; L3.1@47.686,43.545 cw(c46.915,42.773) 48.006,42.773 ; L3.1@47.686,44.136 ccw(c46.915,44.907) 48.006,44.907 ; C21.1@47.744,46.211 36.805,57.15 22.581,57.15 19.209,60.521 U7.2@19.209,63.009 ; C36.1@48.006,41.918 48.006,45.974
  Bottom Layer w0.508: v1@24.892,53.332 24.892,51.562 ; v1@25.089,53.529 cw(c25.934,52.684) U10.1@25.934,53.879 ; 25.535,53.975 U10.1@26.834,53.975 27.483,53.975 28.888,55.38 R52.2@32.59,55.38 ; 32.028,51.918 cw(c32.028,51.369) R55.2@32.416,51.757 ; 32.084,51.918 ccw(c32.084,52.387) R55.2@32.416,52.055 ; R61.2@32.59,44.958 29.896,44.958 28.499,46.355 U10.7@26.834,46.355 25.273,46.355 24.892,46.736 24.892,48.768 ; R58.2@32.59,48.432 29.419,48.432 28.956,48.895 U10.5@26.834,48.895 25.019,48.895 24.892,48.768 ; R55.2@32.59,51.906 32.578,51.918 29.185,51.918 28.702,51.435 U10.3@26.834,51.435 25.019,51.435 24.892,51.562 ; R32.1@64.105,74.723 ccw(c63.745,75.083) 64.254,75.083 ccw(c64.763,75.083) R32.1@64.403,74.723 ; R32.1@64.254,74.549 64.254,76.192 v1(64.262,76.2) ; 24.892,48.768 24.892,51.562
3.3VA: C40.1 L3.2 U8.13 | length 20.2
  Top Layer w0.254: U8.13@50.038,34.258 51.352,34.258 52.07,34.976 ; 52.173,35.078 ccw(c51.683,35.568) C40.1@52.375,35.568 ; C40.1@52.705,35.23 ccw(c52.684,34.361) 52.07,34.976 ; C40.1@52.738,35.568 52.387,35.217 52.311,35.217 52.07,34.976
  Top Layer w0.508: L3.2@49.607,43.79 50.934,43.79 53.34,41.383 53.34,36.17 C40.1@52.738,35.568 ; L3.2@49.838,43.61 cw(c50.272,43.176) 50.272,43.79 ; L3.2@49.838,44.071 ccw(c50.517,44.75) 50.517,43.79 ; C40.1@52.614,35.717 ccw(c50.862,37.469) 53.34,37.469 ; C40.1@52.763,35.779 ccw(c52.763,36.228) C40.1@53.081,35.911 ; C40.1@52.973,35.358 ccw(c52.088,36.243) 53.34,36.243 ; C40.1@52.974,35.568 cw(c53.544,35.568) C40.1@53.141,35.971
5.0V: C16.1 C18.2 C20.1 C22.1 C23.1 C39.2 J7.3 L1.2 R22.2 R23.2 R63.2 U5.4 U6.2 U7.3 | length 303.4
  Top Layer w0.508: R22.2@41.918,79.78 46.172,79.78 ; R22.2@42.067,79.97 ccw(c42.525,80.428) 42.525,79.78
  Top Layer w0.762: U5.4@24.638,69.52 21.844,69.52 21.082,68.758 21.082,66.436 22.209,65.309 U7.3@25.209,65.309 26.563,65.309 C39.2@28.209,63.663 ; U7.3@25.809,65.19 cw(c25.809,63.083) 27.299,64.573 ; 26.614,65.257 ccw(c28.067,66.71) v1@28.067,64.656 ; C39.2@27.691,64.181 cw(c27.223,63.714) C39.2@27.884,63.714 ; v1@28.009,64.745 ccw(c28.895,64.349) C39.2@28.209,63.663 ; C39.2@28.868,63.844 ccw(c29.306,64.281) 29.306,63.663 ; C20.1@30.748,63.663 C39.2@28.209,63.663 ; R23.2@49.987,57.506 51.105,57.506 cw(c51.105,57.524) v1(51.086,57.524) ; U6.2@51.086,59.58 ccw(c53.9,59.58) C23.1@51.91,57.59 ; U6.2@51.086,61.367 v1(51.086,57.524) ; C23.1@51.851,57.506 ccw(c51.832,57.506) 51.832,57.524 v1(51.086,57.524)
  Top Layer w1.016: v3(3.048,59.182) v3(17.78,59.182) ; v3(23.368,58.674) 31.996,58.674 33.477,60.155 33.477,62.23 32.044,63.663 C20.1@30.748,63.663 ; C39.2@28.403,63.714 38.822,63.714 42.926,67.818 42.926,76.534 46.172,79.78 47.672,81.28 68.326,81.28 76.2,73.406 98.806,73.406 110.744,61.468 110.744,55.372 109.728,54.356 v3(109.728,23.622) ; R63.2@93.456,11.797 93.456,14.716 99.668,20.928 v3(105.156,20.928)
  Bottom Layer w1.016: v3(3.048,59.182) 2.032,58.166 2.032,41.91 3.302,40.64 7.62,40.64 8.636,39.624 16.764,39.624 17.272,39.116 J7.3@17.272,37.084 ; v3(17.78,59.182) 22.86,59.182 v3(23.368,58.674) ; C16.1@33.282,66.294 C18.2@36.068,69.08 ; v3(105.156,20.928) 107.034,20.928 v3(109.728,23.622)
  Bottom Layer w1.524: L1.2@24.892,66.421 32.639,66.421 C16.1@32.766,66.294 33.282,66.294 43.95,66.294 C22.1@48.927,61.317 ; 31.233,66.421 cw(c31.233,64.761) C16.1@32.407,65.935
  other v1: 51.086,58.623 28.88,64.694 28.067,64.719
12V: C17.1 C38.1 D1.2 D3.2 Q5.2 R29.1 U5.1 | length 122
  Top Layer w0.508: v2@3.524,43.466 cw(c2.911,43.466) 3.345,43.032 cw(c3.778,42.599) v2@3.778,43.212 ; v2(3.778,43.466) 2.286,41.973 2.286,21.844 4.064,20.066 10.057,20.066 10.092,20.031 10.887,20.031 Q5.2@14.957,15.961 16.708,15.961 R29.1@16.927,15.742 ; Q5.2@14.754,15.961 ccw(c14.263,15.961) 14.61,16.308 ccw(c14.957,16.655) Q5.2@14.957,16.164 ; Q5.2@15.101,15.817 cw(c15.448,15.47) 15.448,15.961 cw(c15.448,16.452) Q5.2@15.101,16.105 ; 15.864,15.961 cw(c15.864,14.704) R29.1@16.753,15.593
  Top Layer w1.016: C38.1@14.193,74.094 ccw(c11.849,76.437) 15.164,76.437 ; C38.1@14.732,73.301 15.164,73.733 D1.2@15.164,78.232 20.676,78.232 24.282,74.625 U5.1@24.638,74.625 ; D1.2@14.76,77.536 cw(c13.784,76.56) 15.164,76.56 cw(c16.544,76.56) D1.2@15.568,77.536 ; D1.2@15.568,77.828 cw(c16.544,76.852) 16.544,78.232 cw(c16.544,79.612) D1.2@15.568,78.636 ; 21.66,77.248 cw(c19.037,74.625) U5.1@22.746,74.625 ; 23.394,75.514 cw(c22.506,74.625) U5.1@23.762,74.625
  Bottom Layer w0.508: v2@3.599,43.645 ccw(c3.165,44.079) 3.778,44.079 ccw(c4.391,44.079) v2@3.958,43.645 ; v2(3.778,43.466) 3.778,56.88 4.422,57.524 4.422,61.332 6.799,63.709 6.799,74.617 7.798,75.616 v1(15.138,75.616)
  Bottom Layer w1.016: D3.2@14.803,72.688 ccw(c13.993,73.498) 15.138,73.498 ; D3.2@14.812,72.697 ccw(c14.149,73.431) 15.138,73.431 ; v1(15.138,75.616) 15.138,73.431 ; 17.111,71.755 cw(c16.442,71.086) C17.1@17.388,71.086 ; C17.1@17.78,71.086 16.349,72.517 D3.2@14.224,72.517 15.138,73.431
12V_OUT: J8.1 R39.2 R42.2 R45.2 R48.2 R51.2 R54.2 R57.2 R60.2 | length 56.6
  Top Layer w0.508: J8.1@9.881,46.025 12.725,46.025 ; J8.1@11.602,45.844 cw(c12.039,45.407) 12.039,46.025 cw(c12.039,46.643) J8.1@11.602,46.206 ; J8.1@11.903,46.061 ccw(c12.016,46.486) v1@12.236,46.105 ; v1@12.166,46.025 cw(c12.166,44.831) v1@13.011,45.675 ; v1@12.268,45.987 cw(c12.268,44.791) v1@13.114,45.636 ; v1@13.119,45.719 cw(c13.429,45.715) 13.429,46.025 ; R42.2@14.093,46.689 cw(c14.495,46.286) R42.2@14.495,46.856 ; R42.2@14.153,46.749 ccw(c13.835,47.067) R42.2@14.284,47.067 ; R42.2@14.495,47.092 13.429,46.025 ; R45.2@15.599,52.317 ccw(c15.239,52.677) 15.748,52.677 ccw(c16.257,52.677) R45.2@15.897,52.317 ; R48.2@15.599,53.894 cw(c15.239,53.534) 15.748,53.534 cw(c16.257,53.534) R48.2@15.897,53.894 ; v1@15.67,52.95 cw(c15.305,52.71) R45.2@15.726,52.597 ; R45.2@15.748,52.168 R48.2@15.748,54.043 ; R39.2@15.842,45.071 ccw(c15.481,44.711) 15.481,45.22 ccw(c15.481,45.729) R39.2@15.842,45.369 ; R39.2@16.016,45.22 13.53,45.22 12.725,46.025 ; 12.725,46.025 13.429,46.025
  Bottom Layer w0.508: v1(12.268,46.05) 12.243,46.025 8.89,46.025 5.055,49.86 5.055,53.721 6.223,54.889 14.819,54.889 15.869,53.84 R51.2@16.002,53.84 ; 15.432,54.277 ccw(c15.977,54.822) R51.2@15.977,54.051 ; R60.2@15.472,44.783 ccw(c15.112,44.423) 15.112,44.933 ccw(c15.112,45.442) R60.2@15.472,45.082 ; R54.2@15.497,52.055 ccw(c15.137,52.415) 15.646,52.415 ccw(c16.156,52.415) R54.2@15.796,52.055 ; R60.2@15.646,44.933 13.843,44.933 v1(13.056,45.72) 14.228,46.892 R57.2@16.002,46.892 ; R54.2@15.646,51.906 15.646,53.484 R51.2@16.002,53.84 ; 15.646,52.532 cw(c17.285,52.532) R51.2@16.126,53.691 ; 15.646,52.647 cw(c16.06,52.647) v1@15.768,52.939 ; 15.646,53.322 ccw(c16.06,53.322) v1@15.768,53.029 ; v1@15.784,53.002 cw(c16.607,53.235) R51.2@16.002,53.84 ; R57.2@15.828,46.743 ccw(c15.468,46.383) 15.468,46.892 ccw(c15.468,47.401) R57.2@15.828,47.041
  other v1: 15.723,52.984
BOOT0: R33.1 U8.60 | length 5
  Top Layer w0.254: R33.1@45.722,24.219 ccw(c45.662,24.384) 45.838,24.384 ; R33.1@45.838,23.876 45.838,24.384 ; R33.1@45.916,23.931 cw(c46.51,24.158) 46.061,24.607 ; R33.1@45.954,24.219 cw(c46.014,24.384) 45.838,24.384 ; R33.1@46.154,24.022 cw(c46.911,24.311) 46.338,24.884 ; U8.60@46.338,26.558 46.338,24.884 ; 45.838,24.384 46.338,24.884
CAN_N: J6.3 R21.1 U4.6 | length 20.7
  Top Layer w0.508: J6.3@5.055,29.48 cw(c5.055,27.679) 6.328,28.952 cw(c7.602,30.226) J6.3@5.801,30.226 ; J6.3@5.055,30.226 12.948,22.333 R21.1@15.356,22.333 15.491,22.198 U4.6@18.023,22.198 ; R21.1@15.182,22.184 ccw(c14.822,21.824) 14.822,22.333 ccw(c14.822,22.842) R21.1@15.182,22.482 ; R21.1@15.53,22.482 ccw(c16.216,23.168) 16.216,22.198
CAN_P: J6.4 R21.2 U4.7 | length 19.6
  Top Layer w0.508: J6.4@5.055,25.4 cw(c5.055,23.599) 6.328,24.872 cw(c7.602,26.146) J6.4@5.801,26.146 ; J6.4@5.055,26.146 10.408,20.793 R21.2@15.356,20.793 15.491,20.928 U4.7@18.023,20.928 ; R21.2@15.182,20.644 ccw(c14.822,20.284) 14.822,20.793 ccw(c14.822,21.302) R21.2@15.182,20.942 ; R21.2@15.53,20.644 cw(c16.216,19.958) 16.216,20.928
CAN_RX: U4.4 U8.44 | length 19.1
  Top Layer w0.254: U4.4@23.611,23.468 23.765,23.622 27.018,23.622 33.654,30.258 U8.44@39.138,30.258 ; U4.4@24.448,23.342 cw(c25.123,22.667) 25.123,23.622
CAN_TX: U4.1 U8.45 | length 21.8
  Top Layer w0.254: U4.1@23.611,19.658 26.77,19.658 27.953,20.841 27.953,23.206 34.505,29.758 U8.45@39.138,29.758 ; U4.1@24.448,19.532 cw(c24.752,19.229) 24.752,19.658 cw(c24.752,20.087) U4.1@24.448,19.784
CPU_WK: R30.2 U8.50 | length 26.5
  Top Layer w0.254: R30.2@24.42,15.734 37.078,15.734 41.338,19.994 U8.50@41.338,26.558 ; R30.2@24.659,15.495 cw(c25.236,14.918) 25.236,15.734 cw(c25.236,16.55) R30.2@24.659,15.973
EC20_RST: B1.1 C6.1 J1.22 Q1.3 R1.1 | length 44
  Top Layer w0.508: B1.1@85.283,9.899 91.186,15.802 v1(91.186,18.542) ; B1.1@86.029,9.899 cw(c87.83,9.899) 86.556,11.172 ; v1(88.138,22.352) 88.138,23.114 86.36,24.892 86.36,28.194 87.376,29.21 v1@89.8,29.21 ; v1(89.332,38.024) 89.8,37.556 J1.22@89.8,35.302
  Bottom Layer w0.508: v1(88.138,22.352) 91.186,19.304 v1(91.186,18.542) ; C6.1@89.221,34.37 cw(c88.861,34.01) 89.37,34.01 cw(c89.879,34.01) C6.1@89.519,34.37 ; C6.1@89.221,34.718 ccw(c88.861,35.078) 89.37,35.078 ccw(c89.879,35.078) C6.1@89.519,34.718 ; v1(89.332,38.024) 89.332,36.704 R1.1@89.46,36.576 89.37,36.486 C6.1@89.37,34.544 89.37,33.73 90.08,33.02 Q1.3@90.08,31.66 90.08,29.374 v1(89.916,29.21) ; 89.37,35.824 cw(c90.187,35.824) R1.1@89.609,36.402 ; Q1.3@89.936,31.516 cw(c89.589,31.169) 90.08,31.169 cw(c90.571,31.169) Q1.3@90.224,31.516 ; Q1.3@89.936,31.804 ccw(c89.589,32.151) 90.08,32.151 ccw(c90.571,32.151) Q1.3@90.224,31.804
GND: B1.2 Bat1.2 Bt1.1 C1.2 C2.2 C3.2 C4.2 C6.2 C8.2 C9.2 C10.2 C11.2 C12.2 C13.2 C14.2 C16.2 C17.2 C18.1 C19.2 C20.2 C21.2 C22.2 C23.2 C24.2 C25.2 C26.2 C27.2 C28.2 C29.2 C30.2 C31.2 C32.2 C33.2 C34.2 C35.2 C36.2 C37.2 C38.2 C39.1 C40.2 D2.1 D3.1 D6.1 J1.4 J1.9 J1.15 J1.18 J1.21 J1.26 J1.27 J1.29 J1.34 J1.35 J1.37 J1.40 J1.43 J1.50 J1.53 J1.54 J1.55 J1.56 J2.5 J3.4 J4.2 J5.2 J6.5 J6.8 J7.4 LED2.2 Q1.2 Q4.2 Q6.2 R5.2 R11.1 R12.1 R13.1 R18.2 R25.1 R26.1 R28.1 R31.1 R33.2 R38.2 U1.8 U2.2 U3.5 U4.2 U4.8 U5.3 U5.5 U6.3 U7.1 U8.12 U8.18 U8.31 U8.47 U8.63 | length 595.6
  Top Layer w0.254: C35.2@36.583,26.502 ccw(c36.006,27.079) 36.822,27.079 ccw(c37.638,27.079) C35.2@37.061,26.502 ; C35.2@36.822,26.238 36.822,27.729 37.851,28.758 U8.47@39.138,28.758 ; C34.2@39.116,39.632 40.683,39.632 41.338,38.977 U8.31@41.338,37.458 ; C34.2@39.38,39.393 cw(c39.957,38.816) 39.957,39.632 cw(c39.957,40.448) C34.2@39.38,39.871 ; R33.2@47.196,24.186 ccw(c46.984,24.518) 47.378,24.518 ; R33.2@47.378,23.876 47.378,24.518 ; R33.2@47.56,24.186 cw(c47.772,24.518) 47.378,24.518 ; v2@47.569,34.727 ccw(c46.918,35.378) 47.838,35.378 ccw(c48.758,35.378) v2@48.107,34.727 ; U8.63@47.838,26.558 47.838,24.978 47.378,24.518 ; v2@47.838,34.077 cw(c47.838,33.157) 48.488,33.808 cw(c49.139,34.458) v2@48.219,34.458 ; U8.18@47.838,37.458 v2(47.838,34.458) 48.538,33.758 U8.12@50.038,33.758 52.468,33.758 C40.2@52.738,34.028
  Top Layer w0.508: U4.8@18.023,19.658 19.324,18.357 ; U4.8@18.277,19.658 ccw(c18.89,19.658) 18.457,19.224 ; U3.5@18.734,33.706 ccw(c18.734,34.182) v2@19.071,33.845 ; U4.8@18.785,19.658 ccw(c20.625,19.658) 19.324,18.357 ; U3.5@18.823,33.702 ccw(c18.637,34.023) v2@19.008,34.031 ; v2@19.009,34.012 cw(c18.566,33.969) U3.5@18.881,33.655 ; v2@19.056,34.184 cw(c18.023,34.926) U3.5@18.023,33.655 U3.5@18.881,33.655 ; v2@19.145,16.866 cw(c18.711,16.432) 19.324,16.432 cw(c19.937,16.432) v2@19.504,16.866 ; v2@19.145,17.225 ccw(c18.711,17.659) 19.324,17.659 ccw(c19.937,17.659) v2@19.504,17.225 ; R31.1@19.175,15.908 ccw(c18.815,16.268) 19.324,16.268 ccw(c19.834,16.268) R31.1@19.473,15.908 ; v2@19.237,33.783 ccw(c19.195,33.341) U3.5@18.881,33.655 ; v2(19.262,34.036) U3.5@18.881,33.655 ; R31.1@19.324,15.734 19.324,18.357 ; U4.2@23.611,20.928 26.087,20.928 C14.2@26.162,20.853 ; v2@24.712,20.748 ccw(c24.279,20.315) 24.279,20.928 ccw(c24.279,21.541) v2@24.712,21.108 ; v2@25.072,20.748 cw(c25.505,20.315) 25.505,20.928 cw(c25.505,21.541) v2@25.072,21.108 ; 25.447,20.928 cw(c25.447,20.164) C14.2@25.988,20.704 ; U5.3@32.425,75.279 ccw(c31.263,79.757) LED2.2@35.889,79.758 35.889,73.635 U5.3@33.477,71.223 ; U5.3@32.552,74.788 ccw(c31.433,79.101) 35.889,79.101 ; U5.3@32.68,74.296 ccw(c31.604,78.444) 35.889,78.444 ; U5.3@32.808,73.804 ccw(c31.774,77.788) 35.889,77.788 ; U5.3@32.935,73.313 ccw(c31.944,77.131) 35.889,77.131 ; U5.3@33.063,72.821 ccw(c32.115,76.474) 35.889,76.474 ; U5.3@33.19,72.329 ccw(c32.285,75.818) 35.889,75.818 ; U5.3@33.318,71.837 ccw(c32.456,75.161) U5.3@35.889,75.161 ; U5.3@33.406,73.532 cw(c33.994,72.268) U5.3@34.471,73.578 ; U5.3@33.817,74.313 cw(c34.204,73.544) U5.3@34.473,74.362 ; U5.3@34.015,73.886 ccw(c33.557,74.666) U5.3@34.432,74.438 ; U5.3@34.224,73.412 ccw(c34.032,73.787) U5.3@34.433,73.657 ; U5.3@34.481,74.484 ccw(c34.307,75.37) U5.3@35.057,74.867 ; U5.3@34.556,74.429 cw(c35.409,74.523) U5.3@34.74,75.059 ; U5.3@34.557,73.64 cw(c36.013,73.692) U5.3@34.947,74.685 ; U5.3@34.973,74.145 cw(c35.492,73.621) U5.3@35.496,74.359 ; U5.3@35.324,73.476 ccw(c34.258,74.074) U5.3@35.435,74.405 ; U5.3@35.34,74.075 ccw(c34.977,74.358) U5.3@35.433,74.414 ; U5.3@35.452,74.467 ccw(c34.395,75.523) U5.3@35.889,75.523 ; U5.3@35.458,74.472 ccw(c34.755,75.388) U5.3@35.899,75.237 ; U5.3@35.46,74.37 cw(c34.876,73.542) U5.3@35.889,73.542 ; U5.3@35.461,74.475 ccw(c35.173,74.91) U5.3@35.684,74.806 ; U5.3@35.504,75.039 ccw(c36.238,74.804) U5.3@35.553,74.451 ; LED2.2@35.62,79.488 cw(c34.969,78.838) 35.889,78.838 cw(c36.809,78.838) LED2.2@36.159,79.488 ; U5.3@35.889,75.518 ccw(c37.773,75.518) U5.3@36.441,74.186 ; R28.1@45.424,58.311 cw(c45.063,57.951) 45.573,57.951 cw(c46.082,57.951) R28.1@45.722,58.311 ; R28.1@45.424,58.66 ccw(c44.654,59.43) 45.743,59.43 ; Q4.2@45.599,60.05 cw(c45.252,59.703) 45.743,59.703 cw(c46.233,59.703) Q4.2@45.886,60.05 ; Q4.2@45.743,60.193 45.743,58.655 cw(c45.573,58.655) R28.1@45.573,58.485 45.573,55.918 ; 45.986,55.506 ccw(c47.286,56.806) C24.2@47.286,54.967 ; C24.2@46.273,54.028 ccw(c43.865,54.211) 45.573,55.918 ; C24.2@46.355,55.136 cw(c45.319,54.1) C24.2@46.78,53.989 ; v2@47.152,22.976 ccw(c47.641,22.725) 47.252,22.336 ; v2@47.198,22.68 cw(c46.765,22.247) 47.378,22.247 cw(c47.991,22.247) v2@47.558,22.68 ; v2@47.198,23.04 ccw(c46.765,23.473) 47.378,23.473 ccw(c47.991,23.473) v2@47.558,23.04 ; R33.2@47.229,23.702 cw(c46.869,23.342) 47.378,23.342 cw(c47.887,23.342) R33.2@47.527,23.702 ; v2@47.243,23.075 ccw(c47.092,23.315) R33.2@47.366,23.388 ; v2@47.287,22.623 cw(c47.067,22.05) C37.2@47.66,22.208 ; v2@47.378,23.262 ccw(c49.137,23.262) C37.2@47.893,22.018 ; R33.2@47.378,23.876 47.378,22.21 C37.2@47.744,21.844 ; R33.2@47.39,23.388 ccw(c47.664,23.315) v2@47.513,23.075 ; C24.2@47.54,53.951 45.573,55.918 ; C33.2@47.569,20.012 ccw(c47.209,20.372) 47.719,20.372 ccw(c48.228,20.372) C33.2@47.868,20.012 ; v2@47.604,22.744 ccw(c48.29,22.39) C37.2@47.744,21.844 ; C33.2@47.719,19.837 47.719,21.819 C37.2@47.744,21.844 ; 47.719,21.248 cw(c48.315,21.248) C37.2@47.893,21.67 ; C30.2@59.668,37.249 ccw(c59.308,37.609) 59.817,37.609 ccw(c60.326,37.609) C30.2@59.966,37.249 ; C31.2@59.668,39.078 cw(c59.308,38.718) 59.817,38.718 cw(c60.326,38.718) C31.2@59.966,39.078 ; C31.2@59.817,39.227 C30.2@59.817,37.1 60.69,37.1 61.214,36.576 v2(61.214,34.186) ; C30.2@59.991,36.951 cw(c60.351,36.591) 60.351,37.1 cw(c60.351,37.609) C30.2@59.991,37.249 ; v2@61.034,34.366 ccw(c60.601,34.799) 61.214,34.799 ccw(c61.827,34.799) v2@61.394,34.366 ; C32.2@67.957,35.314 v2(69.088,35.314) ; C32.2@68.131,35.165 cw(c68.491,34.805) 68.491,35.314 cw(c68.491,35.823) C32.2@68.131,35.463 ; v2@68.908,35.134 ccw(c68.475,34.701) 68.475,35.314 ccw(c68.475,35.927) v2@68.908,35.494 ; v2(78.994,37.76) 79.4,37.354 ; v2@79.006,37.506 cw(c79.031,36.985) 79.4,37.354 ; v2@79.248,37.748 ccw(c79.769,37.723) 79.4,37.354 ; J1.4@79.4,35.302 79.4,37.354 ; v2(81.026,28.448) 81.4,28.074 ; v2@81.054,28.196 cw(c81.1,27.774) 81.4,28.074 ; v2@81.278,28.42 ccw(c81.7,28.374) 81.4,28.074 ; J1.9@81.4,26.202 81.4,28.074 ; J1.15@83.8,26.202 84.582,26.984 v2(84.582,28.448) ; v2@84.402,28.268 cw(c83.969,27.835) 84.582,27.835 cw(c85.195,27.835) v2@84.762,28.268 ; v2(86.614,34.544) 87.442,34.544 J1.18@88.2,35.302 ; v2@86.794,34.364 cw(c87.227,33.931) 87.227,34.544 cw(c87.227,35.157) v2@86.794,34.724 ; v2(89,24.13) 89.4,24.53 ; v2@89.015,24.384 ccw(c89.044,24.886) 89.4,24.53 ; v2@89.254,24.145 cw(c89.756,24.174) 89.4,24.53 ; J1.21@89.4,26.202 89.4,24.53 ; J1.26@91.4,35.302 91.4,33.644 v2(92.286,32.758) 93.726,32.758 94.6,33.632 J1.34@94.6,35.302 ; J1.27@91.8,26.202 91.8,28.046 v2(92.456,28.702) 92.6,28.558 J1.29@92.6,26.202 ; v2@92.032,32.758 ccw(c91.419,32.758) 91.852,33.192 ccw(c92.286,33.625) v2@92.286,33.012 ; v2@92.202,28.702 cw(c91.589,28.702) 92.022,28.268 cw(c92.456,27.835) v2@92.456,28.448 ; v2@92.276,28.522 cw(c91.495,27.741) 92.6,27.741 ; v2@92.466,32.578 cw(c92.899,32.145) 92.899,32.758 cw(c92.899,33.371) v2@92.466,32.938 ; 95,24.32 ccw(c95.882,24.32) v2@95.258,23.696 ; J1.35@95,25.547 ccw(c97.109,25.547) v2@95.618,24.056 ; J1.35@95,26.202 95,23.994 95.118,23.876 95.758,23.876 95.8,23.918 J1.37@95.8,26.202 ; v2@95.258,24.056 ccw(c93.951,25.363) J1.37@95.8,25.363 ; v2@96.436,37.338 cw(c96.436,36.725) 96.869,37.158 cw(c97.303,37.592) v2@96.69,37.592 ; v2(96.436,37.592) 97,37.028 J1.40@97,35.302 ; v2@97.864,24.056 ccw(c97.054,24.866) 98.2,24.866 ; v2(98.044,23.876) 98.2,24.032 J1.43@98.2,26.202 ; v2@100.82,37.574 cw(c100.387,37.141) 101,37.141 cw(c101.613,37.141) v2@101.18,37.574 ; J1.50@101,35.302 v2(101,37.754) v2@101.092,37.846 ; J2.5@101.164,10.799 cw(c101.606,10.799) 101.293,11.111 ; J2.5@101.168,9.899 101.168,10.986 102.315,12.133 R12.1@103.986,12.133 ; R12.1@103.812,11.984 ccw(c103.452,11.624) 103.452,12.133 ccw(c103.452,12.642) R12.1@103.812,12.282
  Top Layer w0.762: J6.8@5.055,9.807 cw(c5.055,6.047) 7.713,8.706 ; J6.8@5.055,10.569 cw(c5.055,8.649) 6.412,10.007 ; J6.8@5.993,10.426 9.561,6.858 R38.2@11.839,6.858 ; C19.2@13.75,62.106 cw(c17.947,62.106) C38.2@15.294,65.358 ; C19.2@13.75,62.23 13.75,65.319 C38.2@14.732,66.301 ; 13.75,63.711 cw(c16.638,63.711) C38.2@14.812,65.948 ; R18.2@14.216,28.476 ccw(c16.284,28.476) v2@14.822,27.014 ; R18.2@14.216,28.956 14.216,27.44 v2(14.732,26.924) C13.2@16.756,26.924 ; Q6.2@19.213,13.829 19.213,15.623 R31.1@19.324,15.734 ; 19.213,15.238 cw(c19.795,15.238) R31.1@19.384,15.65 ; D2.1@19.558,70.18 20.6,71.222 U5.3@24.638,71.222 ; D2.1@20.192,70.372 cw(c22.243,68.32) U5.3@22.243,71.222 ; 22.229,71.218 cw(c22.374,70.677) U5.3@22.653,71.162 ; U5.5@24.638,67.818 30.073,67.818 U5.3@33.476,71.222 ; U7.1@25.209,60.709 28.378,60.709 C39.1@28.403,60.734 29.359,60.734 C20.2@30.748,62.123 ; 27.952,71.222 ccw(c27.952,75.959) U5.3@31.549,72.876 ; 27.954,71.222 cw(c27.954,66.484) U5.3@31.55,69.569 ; C39.1@28.738,60.918 ccw(c28.738,62.861) 30.112,61.487 ; U5.3@30.03,69.855 ccw(c30.532,70.664) U5.3@30.748,69.737 ; U5.3@30.197,70.499 cw(c29.674,69.438) U5.3@30.794,69.819 ; U5.3@30.392,73.868 cw(c24.638,78.799) U5.3@24.638,71.222 ; U5.3@30.393,68.576 ccw(c24.638,63.639) U5.3@24.638,71.222 ; U5.3@30.671,69.8 ccw(c31.648,69.78) U5.3@30.942,69.103 ; U5.3@30.728,69.862 cw(c30.829,68.848) U5.3@31.548,69.57 ; U5.3@30.971,69.073 ccw(c26.296,65.062) 26.296,71.222 ccw(c26.295,77.379) U5.3@30.97,73.372 ; J5.2@33.274,22.86 34.036,22.86 36.822,25.646 C35.2@36.822,26.238 ; J5.2@33.274,23.279 ccw(c33.274,26.13) 35.29,24.114 ; U5.3@33.477,71.223 U5.3@33.476,71.222 ; 36.278,25.102 ccw(c35.166,26.213) C35.2@36.738,26.213 ; v2(38.362,40.386) C34.2@39.116,39.632 ; v2(44.958,46.736) 45.72,45.974 C21.2@45.941,45.974 ; v2@45.081,46.769 ccw(c45.884,46.984) 45.468,46.264 ; v2@45.081,46.767 ccw(c45.852,46.96) 45.455,46.272 ; 45.378,46.316 ccw(c45.941,46.879) C21.2@45.941,46.083 ; C24.2@47.168,53.144 cw(c46.899,52.561) 47.54,52.561 ; C24.2@47.174,54.085 ccw(c48.918,53.707) 47.656,52.445 ; C24.2@47.803,54.077 ccw(c47.948,56.349) 49.558,54.739 ; C24.2@47.851,54.838 ccw(c48.092,58.588) 50.749,55.931 ; C24.2@47.913,53.144 ccw(c48.182,52.561) 47.54,52.561 ; C24.2@47.919,53.924 ccw(c50.542,53.355) 48.644,51.458 ; C24.2@48.663,53.762 ccw(c52.165,53.004) 49.631,50.47 ; C36.2@49.589,41.781 50.531,41.781 v2@50.546,41.765 ; U6.3@50.142,67.121 cw(c45.21,61.368) U6.3@52.788,61.367 cw(c60.37,61.368) U6.3@55.433,67.122 ; U6.3@50.638,67.7 cw(c46.63,63.025) U6.3@52.788,63.025 ; U6.3@51.134,68.278 cw(c48.05,64.682) 52.788,64.682 ; U6.3@51.162,67.163 ccw(c51.568,67.56) U6.3@51.561,66.993 ; U6.3@51.501,67.075 ccw(c52.033,66.907) U6.3@51.538,66.65 ; 52.715,56.052 ccw(c51.286,57.481) C23.2@53.307,57.481 ; U6.3@52.787,70.207 U6.3@52.788,70.206 ; U6.3@52.788,63.026 cw(c58.948,63.026) U6.3@54.937,67.701 ; 52.788,64.683 cw(c57.525,64.683) U6.3@54.441,68.279 ; U6.3@52.857,59.417 ccw(c54.466,59.417) 53.328,58.279 ; U6.3@52.952,67.672 cw(c53.273,62.763) 56.752,66.242 cw(c60.231,69.721) U6.3@55.321,70.041 ; U6.3@53.002,66.912 cw(c53.419,60.529) 57.941,65.052 cw(c62.464,69.575) U6.3@56.082,69.992 ; C25.2@53.027,50.47 49.632,50.47 ; U6.3@53.052,66.151 cw(c53.565,58.296) 59.131,63.862 cw(c64.697,69.429) U6.3@56.842,69.942 ; C23.2@53.307,57.532 ccw(c51.534,57.566) 52.788,58.82 ; U6.3@53.441,69.552 ccw(c54.102,70.213) U6.3@54.102,69.279 ; U6.3@54.039,69.342 ccw(c54.973,69.342) U6.3@54.312,68.681 ; U6.3@55.59,66.984 ccw(c55.985,67.985) U6.3@56.413,66.998 ; U6.3@55.727,67.266 ccw(c56.388,67.927) U6.3@56.388,66.993 ; U6.3@56.026,67.364 ccw(c56.635,67.586) U6.3@56.361,66.998 ; U6.3@56.228,68.63 cw(c57.179,68.875) U6.3@56.333,69.374 ; U6.3@56.325,67.051 ccw(c57.49,67.149) U6.3@56.735,66.255 ; U6.3@56.325,67.056 ccw(c57.259,67.056) U6.3@56.598,66.395 ; U6.3@56.325,67.062 ccw(c56.999,67.001) U6.3@56.48,66.567 ; U6.3@56.441,67.021 ccw(c56.035,67.292) U6.3@56.514,67.387 ; C26.2@57.937,53.053 57.937,50.419 ; 59.08,51.561 ccw(c57.563,53.078) C27.2@59.708,53.078 ; R26.1@59.131,59.088 59.131,63.862 U6.3@52.788,70.206 ; C27.2@59.817,53.078 59.817,52.299 57.937,50.419 ; J1.56@74.412,24.614 cw(c73.356,23.558) 74.85,23.558 cw(c76.344,23.558) J1.56@75.288,24.614 ; v2(74.85,23.368) J1.56@74.85,26.052 ; v2(103.978,18.542) 103.986,18.534 R11.1@103.986,17.356 ; R12.1@103.986,12.133 103.986,11.208 v2@104.018,11.176 ; J1.55@104.783,24.585 cw(c103.897,23.699) 105.15,23.699 cw(c106.403,23.699) J1.55@105.517,24.585 ; J1.55@105.15,26.052 105.15,23.628 v2(105.156,23.622) ; v2(106.172,44.958) 106.172,45.958 C2.2@107.442,47.228 ; U5.3@24.638,71.222 U5.3@33.476,71.222 ; 47.54,52.561 49.632,50.47 ; 47.54,52.561 C24.2@47.54,53.951 48.769,53.951 50.749,55.931 52.594,55.931 53.391,56.728 C23.2@53.391,57.506 53.391,58.217 52.788,58.82 ; 49.632,50.47 51.613,48.489 56.007,48.489 57.937,50.419 ; 52.788,58.82 U6.3@52.788,61.367 U6.3@52.788,70.206
  Top Layer w1.016: Bt1.1@58.01,16.332 65.283,16.332 65.303,16.352 67.214,16.352 ; 62.402,16.332 cw(c62.402,12.647) Bat1.2@65.007,15.253 ; Bat1.2@65.532,13.286 cw(c65.532,1.822) 73.638,9.928 ; Bat1.2@65.532,14.302 cw(c65.532,5.291) 71.904,11.662 ; Bat1.2@65.532,15.318 cw(c65.532,8.76) 70.169,13.397 ; Bat1.2@65.532,16.334 cw(c65.532,12.229) 68.435,15.131 ; Bat1.2@65.688,16.802 cw(c66.038,15.176) 67.214,16.352 ; Bat1.2@66.252,15.599 cw(c67.214,15.361) 67.214,16.352 ; 84.486,13.112 ccw(c83.121,14.478) J3.4@85.052,14.478 ; J3.4@85.344,14.478 85.344,13.97 81.273,9.899 B1.2@78.533,9.899 73.667,9.899 67.214,16.352
  Top Layer w2.032: J4.2@10.16,67.31 11.169,66.301 C38.2@14.732,66.301 15.679,66.301 D2.1@19.558,70.18 ; J4.2@10.679,67.829 ccw(c14.368,71.518) C38.2@14.368,66.301 ; 13.26,66.598 ccw(c13.719,68.31) C38.2@14.605,66.775 ; C38.2@14.732,66.809 ccw(c14.732,70.321) 17.216,67.838 ; 18.206,68.828 ccw(c16.168,70.866) D2.1@19.05,70.866
  Bottom Layer w0.762: C16.2@32.766,72.151 cw(c32.766,67.875) C18.1@35.789,70.899 ; C16.2@32.766,72.913 cw(c32.766,70.477) 34.488,72.2 ; C16.2@32.766,73.294 33.394,73.294 C18.1@36.068,70.62 ; C18.1@35.685,70.959 cw(c35.388,70.445) C18.1@35.962,70.598
  Bottom Layer w1.016: D3.1@14.224,66.929 16.603,66.929 C17.2@17.78,68.106 ; 17.111,67.437 ccw(c16.442,68.106) C17.2@17.388,68.106
  Bottom Layer w1.524: J4.2@10.16,67.31 10.541,66.929 D3.1@14.224,66.929 ; J4.2@10.859,68.009 ccw(c13.465,70.615) D3.1@13.465,66.929
  other v1: 49.259,67.056 51.562,67.056 54.102,67.056 56.388,67.056 32.766,68.58 49.259,69.342 51.562,69.342 54.102,69.342 56.388,69.342 30.734,69.799 34.544,69.901 49.259,71.223 51.562,71.223 54.102,71.223 56.388,71.223 49.259,73.406 51.562,73.406 54.102,73.406 56.388,73.406 34.493,73.638 34.493,74.422 35.496,74.422 50.529,75.616 52.832,75.616 55.372,75.616
  other v2: 103.978,11.176 19.324,17.046 24.892,20.928 47.378,22.86 95.438,23.876 50.749,41.781 26.924,60.706